# Altium PCB ESP_Grow_Main_Rev_A.PcbDoc (part 1 of 2)
Units mil, origin at the board's own origin, x right, y up, seen from the top; angles counter-clockwise.
Board outline 3149.61 x 3149.61 mil, 4 copper layers (Top Copper, GND, Power, Bottom Copper), stack 61.811 mil thick; 66 components, 30 nets, 190 pads, 293 vias.
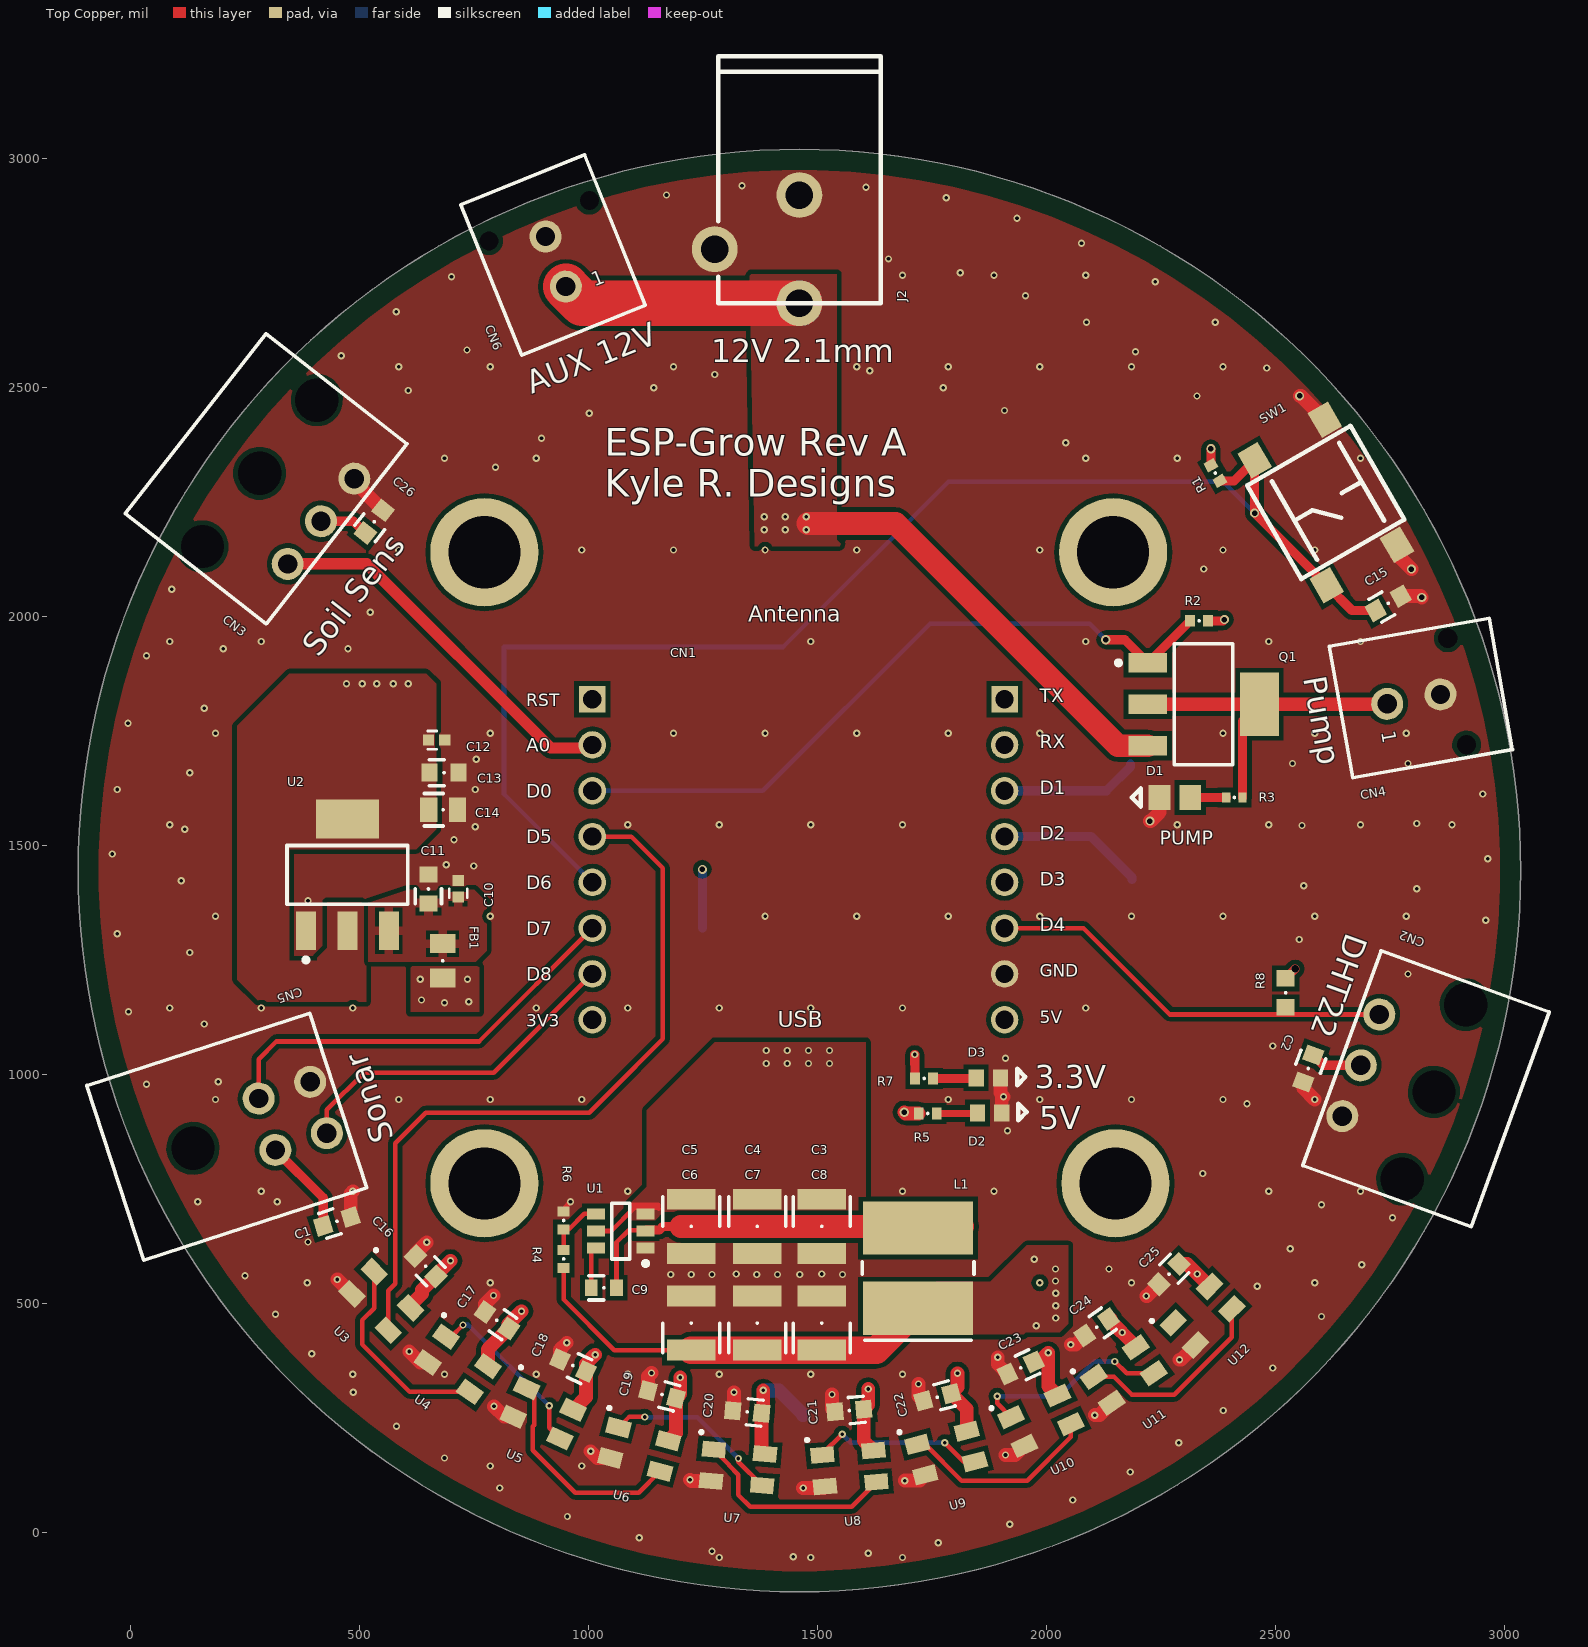
[diagram p0: Top Copper view]
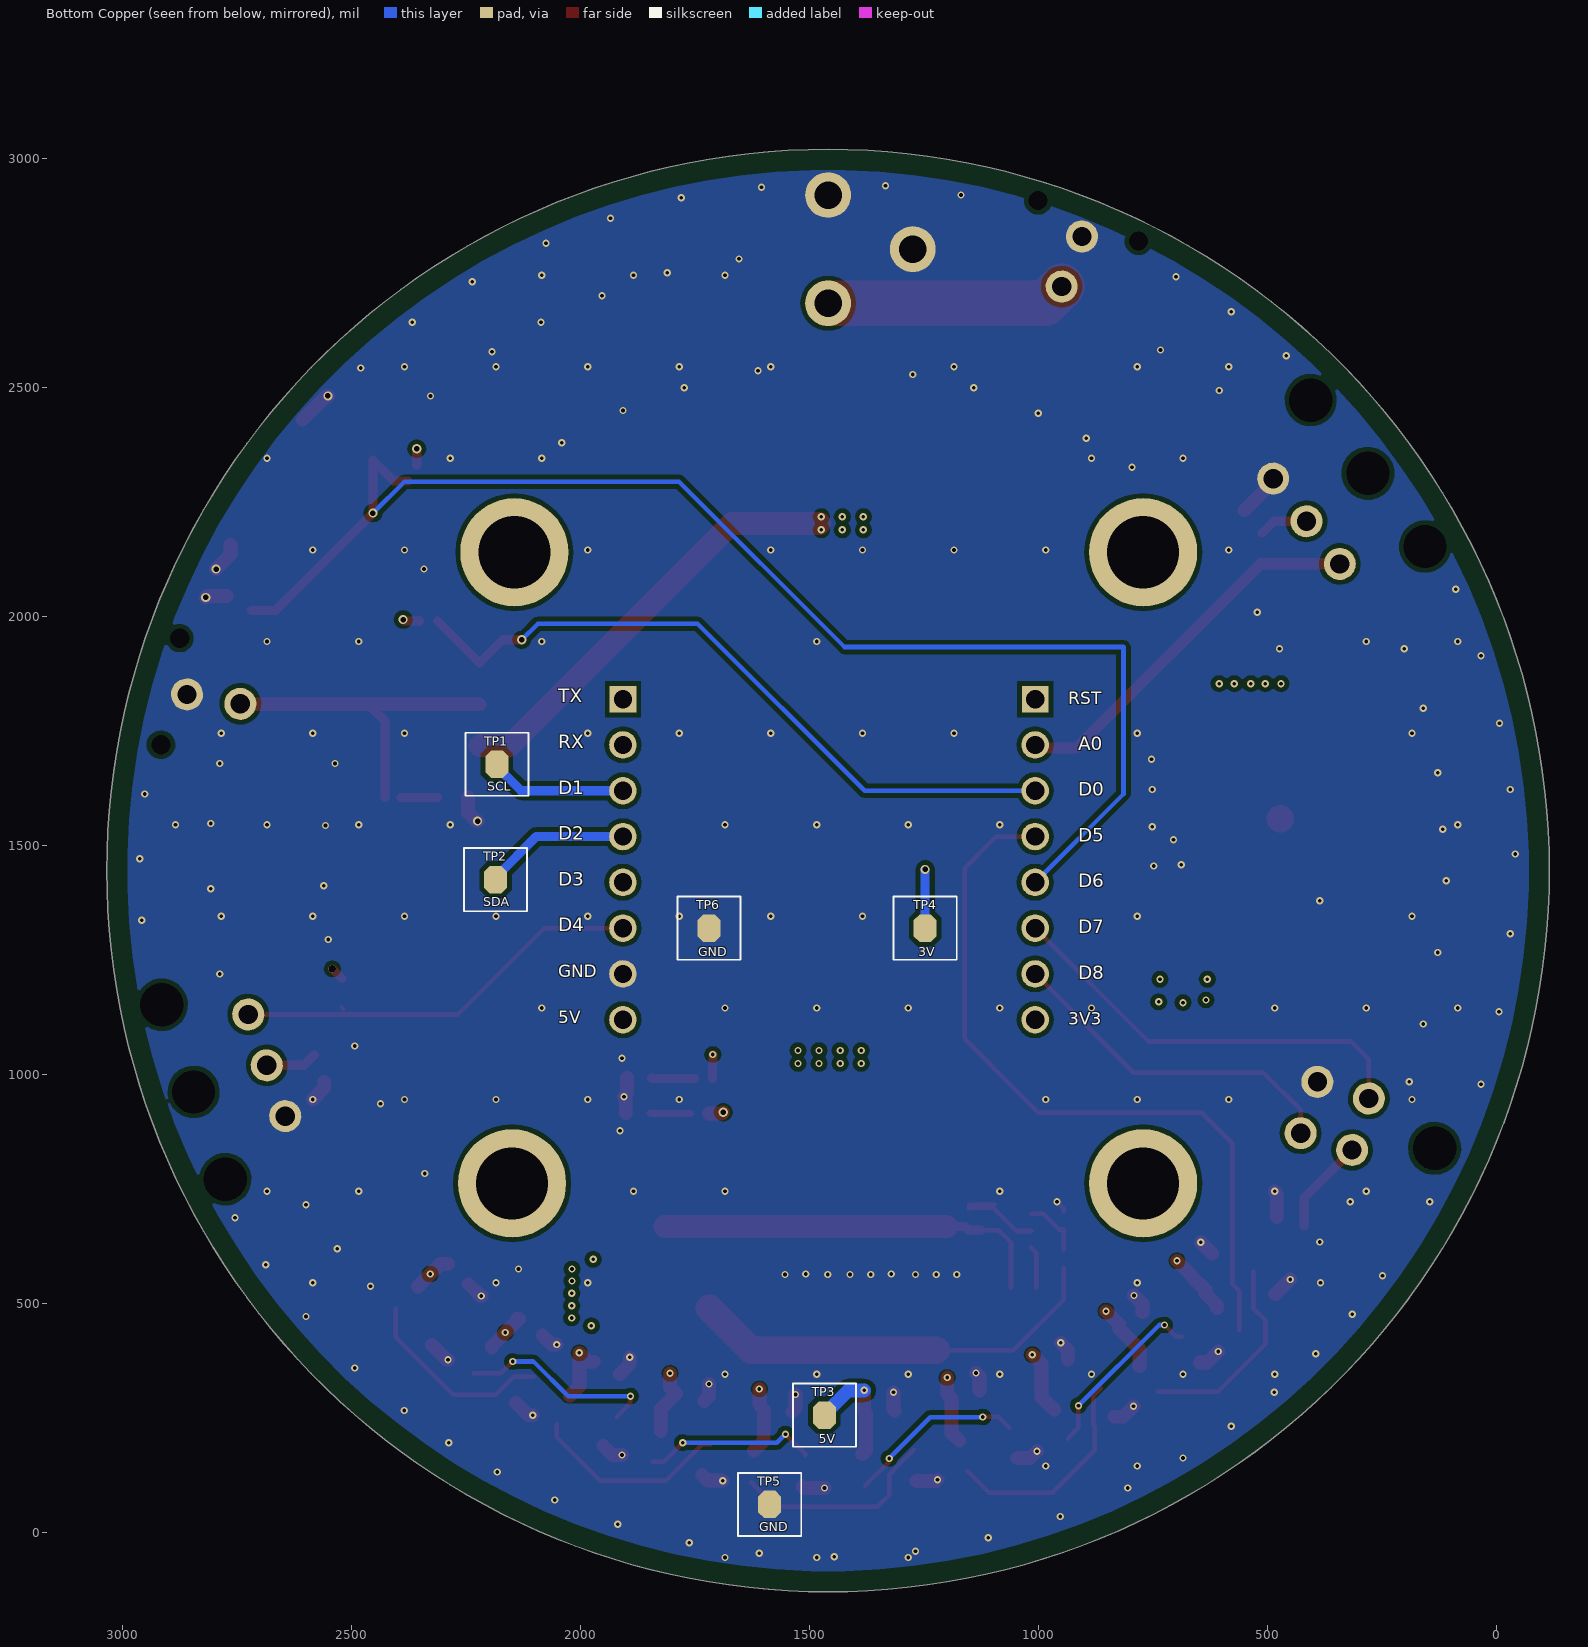
[diagram p1: Bottom Copper view, seen from below]
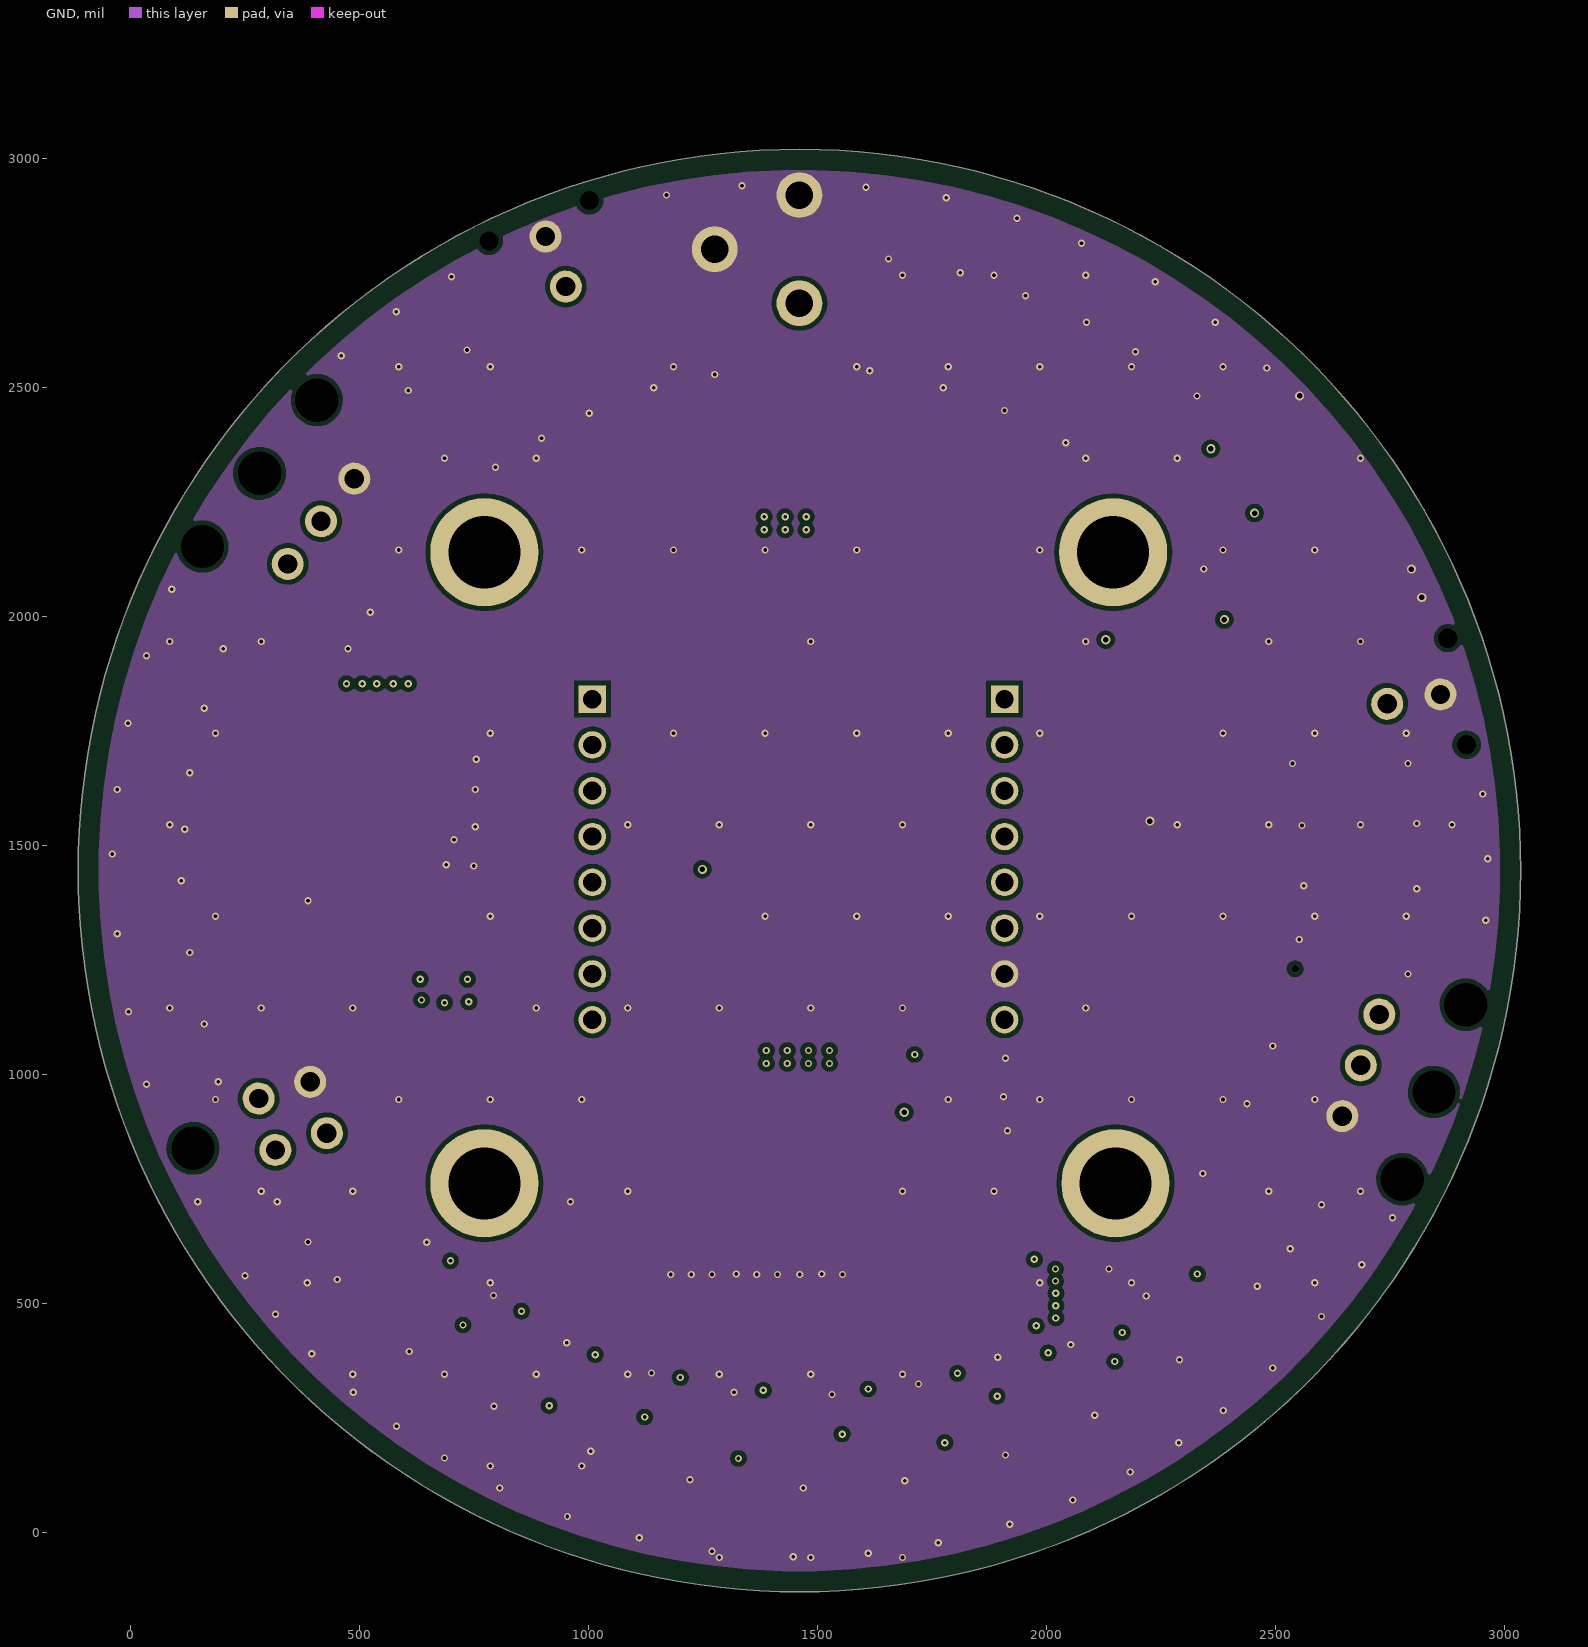
[diagram p2: GND]
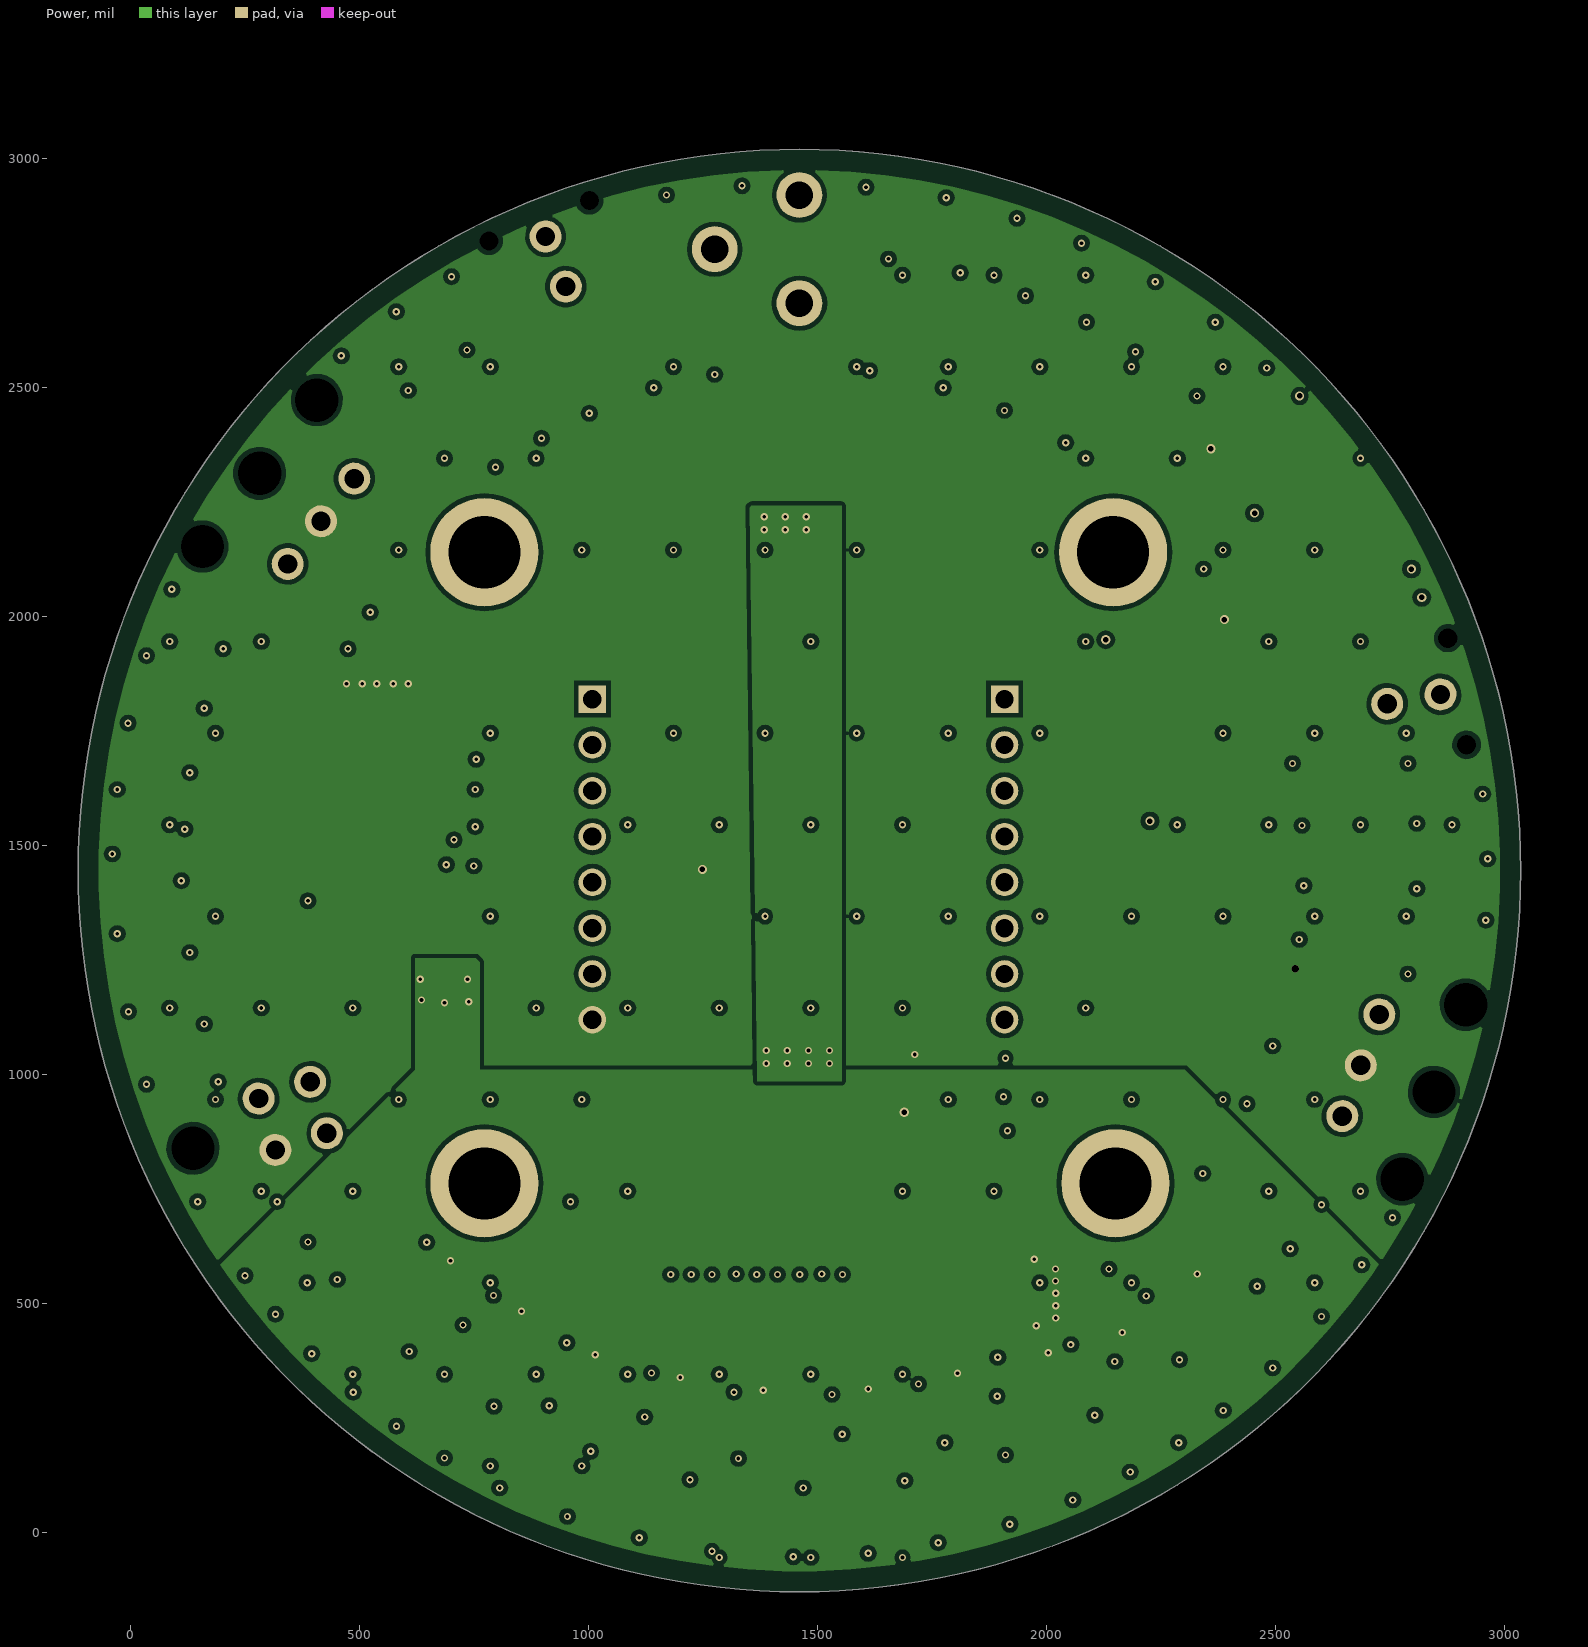
[diagram p3: Power]
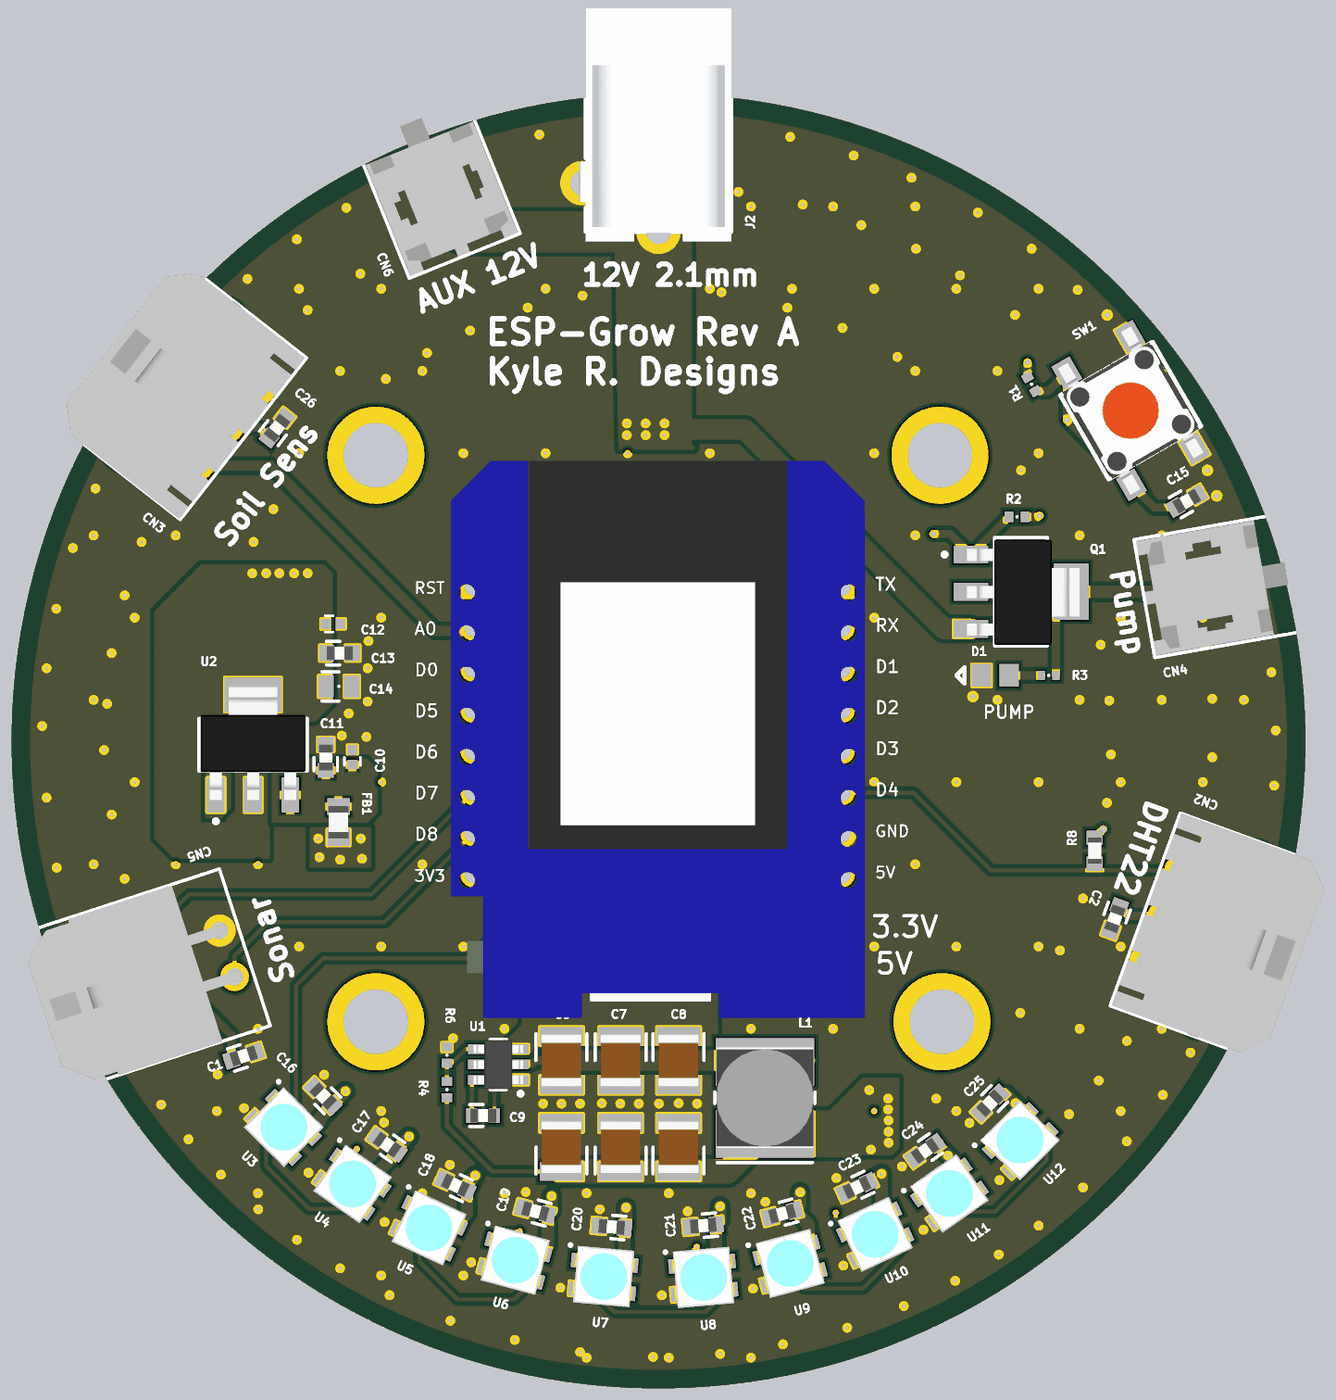
[diagram p4: 3D render of the assembled board from above, using the file's embedded part models]

## Layer stack, top to bottom
Top Mask: solder mask 0.591, Solder Resist, Dk 3.8
Top Copper: signal copper 1.378
Dielectric 1: prepreg 3.937, 2313, Dk 4.05
GND: signal copper 0.689
Core: core 49.803, FR-4, Dk 4.5
Power: signal copper 0.689
Dielectric 2: prepreg 3.937, 2313, Dk 4.05
Bottom Copper: signal copper 1.378
Bottom Mask: solder mask 0.591, Solder Resist, Dk 3.8

## Board outline
-114.8,1445 ccw(c1460,1445) 1460,-129.8 ccw(c1460,1445) 3034.8,1445 ccw(c1460,1445) 1460,3019.8 ccw(c1460,1445)

## Design rules (kind name [scope] priority, off if disabled: settings)
BoardOutlineClearance [All] p1: gap=10 ignorepadtopadclearanceinfootprint=FALSE except(0: Arc-SplitContinuation Track-OutlineEdge Track-SplitContinuation SMDPad-SplitContinuation THPad-SplitContinuation Via-SplitContinuation Fill-SplitContinuation Poly-SplitContinuation Region-SplitContinuation Text-SplitContinuation; 45: Poly-OutlineEdge)
Clearance [All] p1: gap=10 ignorepadtopadclearanceinfootprint=TRUE except(0: Arc-Hole Track-Hole SMDPad-Hole THPad-Hole Via-Hole Fill-Hole Poly-Hole Region-Hole Text-Hole; 2: SMDPad-SMDPad)
HoleSize [All] p1: absolutevalues=TRUE maxlimit=250 minlimit=1 maxpercent=80.000 minpercent=20.000
MinimumSolderMaskSliver [All] p1: minsoldermaskwidth=0
PlaneConnect NetC6_1 [InNet('NetC6_1')] p1: planeconnectstyle=Direct reliefexpansion=20 reliefentries=4 reliefconductorwidth=10 reliefairgap=10
PlaneConnect [All] p2: planeconnectstyle=Direct reliefexpansion=20 reliefentries=4 reliefconductorwidth=10 reliefairgap=10
PolygonConnect PolygonConnect_1 [InNet('5V') Or InNet('3.3V') Or InNet('GND') Or InNet('12V')] p1: connectstyle=Direct reliefconductorwidth=10 reliefentries=4 polygonreliefangle="90 Angle" airgapwidth=10
PolygonConnect PolygonConnect_2 [InNet('NetC6_1')] p2: connectstyle=Direct reliefconductorwidth=10 reliefentries=4 polygonreliefangle="90 Angle" airgapwidth=10
PolygonConnect [All] p3: connectstyle=Relief reliefconductorwidth=20 reliefentries=4 polygonreliefangle="90 Angle" airgapwidth=8
RoutingVias [All] p1: holewidth=12 width=20 viastyle="Through Hole" minholewidth=6 minwidth=10 maxholewidth=28 maxwidth=50
SilkToSilkClearance [All] p1: silktosilkclearance=2
SilkToSolderMaskClearance [IsPad] p1: minsilkscreentomaskgap=1 clearancetoexposedcopper=TRUE
SolderMaskExpansion [All] p1: expansion=4
Width [All] p1: maxlimit=300 minlimit=6 preferedwidth=10
25 further rules are at their usual default settings.

## Components (designator, comment, footprint, x,y, rotation, side; value= is the part's Value field where it differs from the comment)
C1 "1uF" CAPC0603(1608)_N 450.23,679.02 r18 top
C2 "1uF" CAPC0603(1608)_N 2570.87,1012.8 r250 top
C3 "10uF" CAPC1210(3225)_N 1508.78,668 r270 top
C4 "10uF" CAPC1210(3225)_N 1367.78,668 r270 top
C5 "10uF" CAPC1210(3225)_N 1223.78,668 r270 top
C6 "10uF" CAPC1210(3225)_N 1223.78,457 r90 top
C7 "10uF" CAPC1210(3225)_N 1367.78,457 r90 top
C8 "10uF" CAPC1210(3225)_N 1508.78,457 r90 top
C9 "0.1uF" CAPC0603(1608)_L 1033,534 r0 top
C10 "0.1uF" CAPC0402(1005)_N 715,1405.28 r90 top
C11 "1uF" CAPC0603(1608)_N 650,1404.82 r90 top
C12 "0.1uF" CAPC0402(1005)_N 668,1729.82 r0 top
C13 "1uF" CAPC0603(1608)_N 684,1658.82 r0 top
C14 "10uF" CAPC0805(2012)_L 682,1577.82 r0 top
C15 "1uF" CAPC0603(1608)_N 2745.72,2028.57 r30 top
C16 "1uF" CAPC0603(1608)_N 643.73,581.27 r135 top
C17 "1uF" CAPC0603(1608)_N 799.2,463.07 r145 top
C18 "1uF" CAPC0603(1608)_N 965.45,364.31 r155 top
C19 "1uF" CAPC0603(1608)_N 1160,301 r165 top
C20 "1uF" CAPC0603(1608)_N 1346,263 r175 top
C21 "1uF" CAPC0603(1608)_N 1569,266 r185 top
C22 "1uF" CAPC0603(1608)_N 1761,295 r195 top
C23 "1uF" CAPC0603(1608)_N 1943,359 r205 top
C24 "1uF" CAPC0603(1608)_N 2109,448 r215 top
C25 "1uF" CAPC0603(1608)_N 2267,564 r225 top
C26 "1uF" CAPC0603(1608)_N 531.5,2206.69 r52 top
CN1 "J/Wemo_ESP_Shield" WEMOS_D1 954.25,771.89 r0 top locked
CN2 "DHT22" "Molex 1x3 Microfit 90deg" 2685.65,1019.78 r160 top
CN3 "Soil Sens" "Molex 1x3 Microfit 90deg" 415.35,2207.68 r322 top
CN4 "Pump" "Molex 1x2 Microfit 3.0" 2743.41,1809.06 r280 top
CN5 "Sonar" "Molex 2x2 Microfit 90deg" 180.35,701.54 r18 top
CN6 "AUX 12V" "Molex 1x2 Microfit 3.0" 950,2720 r22 top
D1 "D/LEDR/0805" D/0805 2279.72,1604.57 r0 top
D2 "D/LEDB/0603" D/0603 1875.2,915.86 r180 top
D3 "D/LEDB/0603" D/0603 1872.32,992.39 r180 top
FB1 "600 Ohm @ 100MHz" RESC0805(2012)_N 681,1248 r90 top
J2 "12V 2.1mm" CONN_PWR_JACK_2.1x5.5mm 1460,2683.78 r0 top
L1 "4.7uH" INDP6060X45N 1719,577 r90 top
Q1 "DMP6023LE-13" "SOT-223 - DMP6023LE" 2342.52,1808.07 r270 top
R1 "10K" RESC0402(1005)_N 2368.11,2312.99 r120 top
R2 "10K" RESC0402(1005)_N 2332.68,1990.16 r0 top
R3 "1K" RESC0402(1005)_L 2409.72,1604.57 r0 top
R4 "56.2K 1%" RESC0402(1005)_N 945,597 r270 top
R5 "470" RESC0402(1005)_N 1740.2,914.64 r180 top
R6 "10K" RESC0402(1005)_N 945,681 r270 top
R7 "100" RESC0402(1005)_N 1732.32,991.05 r180 top
R8 "4.7K" RESC0603(1608)_N 2521.65,1178.15 r90 top
SW1 "SPST-NO 12V" "SW TACT Red 6mm x 6mm" 2609.27,2248.66 r120 top
TP1 "SCL" Pogo-Testpoint 2183.07,1677.17 r180 bottom
TP2 "SDA" Pogo-Testpoint 2186.02,1425.2 r180 bottom
TP3 "5V" Pogo-Testpoint 1468,256 r180 bottom
TP4 "3V" Pogo-Testpoint 1248.02,1319.29 r180 bottom
TP5 "GND" Pogo-Testpoint 1587.6,61.02 r180 bottom
TP6 "GND" Pogo-Testpoint 1720,1319.29 r180 bottom
U1 "U/TPS562209DDCR" SOT-23 1070,658 r180 top
U2 "3.3V" DSO-G3 473,1435.82 r0 top
U3 "SK6812 MINI" SK6812_MINI 531.66,569.34 r315 top
U4 "SK6812 MINI" SK6812_MINI 688.09,427.36 r325 top
U5 "SK6812 MINI" SK6812_MINI 864.31,314.85 r335 top
U6 "SK6812 MINI" SK6812_MINI 1065,229 r345 top
U7 "SK6812 MINI" SK6812_MINI 1273,180.64 r355 top
U8 "SK6812 MINI" SK6812_MINI 1510,168.64 r5 top
U9 "SK6812 MINI" SK6812_MINI 1717,192 r15 top
U10 "SK6812 MINI" SK6812_MINI 1921.88,251.44 r25 top
U11 "SK6812 MINI" SK6812_MINI 2102.48,339.44 r35 top
U12 "SK6812 MINI" SK6812_MINI 2276.28,457.72 r45 top

## Footprints (in the part's own frame and the unit in brackets; to place one, negate y for a bottom-side part, rotate by r counter-clockwise, add the part's x,y. Pads: shape width x height; smd on the part's side, far side on the other; paste and mask are expansions set on the pad)
CAPC0402(1005)_N [mm] "Chip Capacitor, Body 1.0x0.5mm, Height 0.7mm, IPC Medium Density"
  rect 0.62x0.62 smd: 1(-0.45,0) 2(0.45,0)
  silkscreen extent -0.5,-0.5 0,0.5, body extent -0.55,-0.3 0.55,0.3, height 0.7
CAPC0603(1608)_L [mm] "Chip Capacitor, Body 1.6x0.8mm, Height 1.0mm, IPC High Density"
  rect 0.7x0.9 smd: 1(-0.7,0) 2(0.7,0)
  silkscreen extent -0.82,-0.68 0.05,0.68, body extent -0.8,-0.44 0.8,0.43, height 0.86
CAPC0603(1608)_N [mm] "Chip Capacitor, Body 1.6x0.8mm, Height 1.0mm, IPC Medium Density"
  rect 0.9x1 smd: 1(-0.8,0) 2(0.8,0)
  silkscreen extent -0.82,-0.73 0.05,0.73, body extent -0.8,-0.44 0.8,0.43, height 0.86
CAPC0805(2012)_L [mm] "Chip Capacitor, Body 2.0x1.2mm, Height 1.55mm, IPC High Density"
  rect 0.95x1.35 smd: 1(-0.8,0) 2(0.8,0)
  silkscreen extent -1.05,-0.9 0.05,0.9, body extent -1.1,-0.72 1.1,0.72, height 1.55
CAPC1210(3225)_N [mm] "Chip Capacitor, Body 3.2x2.5mm, Height 6.3mm, IPC Medium Density"
  rect 1.15x2.7 smd: 1(-1.5,0) 2(1.5,0)
  silkscreen extent -1.65,-1.58 0.05,1.57, body extent -1.6,-1.25 1.6,1.25, height 2.5
CONN_PWR_JACK_2.1x5.5mm [mil] "Power Connector, 2.1mm ID, 5.5mm OD"
  round 100 hole 60: 1(0,0) 2(0,236.22) 3(-185.04,118.11)
  silkscreen extent -177,0 177,539, body extent -193,-24 177,543, height 433
D/0603 [mm] "LED, 2-Leads, Body 1.60x0.80mm, IPC Medium Density"
  rect 0.85x0.95 smd: 1(-0.675,0) 2(0.675,0)
  silkscreen extent -2.05,-0.5 -1.6,0.4, body extent -0.85,-0.45 0.85,0.45, height 0.9
D/0805 [mm] "LED, 2-Leads, Body 2.00x1.25mm, IPC Medium Density"
  rect 1.2x1.4 smd: 1(-0.85,0) 2(0.85,0)
  silkscreen extent -2.4,-0.5 -1.9,0.5, body extent -1.05,-0.67 1.05,0.67, height 1.35
DSO-G3 [mm] "SOT-223/SC-73; 4 Leads; Body 6.7 x 7.3 mm, inc. leads (LxW max)"
  rect 1.1x2.15 smd: 1(-2.3,-3.1) 2(0,-3.1) 3(2.3,-3.1)
  rect 3.5x2.15 smd: 4(0,3.1)
  silkscreen extent -3.35,-4.85 3.35,1.63, body extent -3.25,-3.4 3.25,3.56, height 1.68
INDP6060X45N [mm] "Precision Wire Wound Inductor, 2-Leads, Body 6.00x6.00mm, IPC Medium Density"
  rect 2.95x6.1 smd: 1(-2.225,0) 2(2.225,0)
  silkscreen extent -4,-3.1 0.35,3.1, body extent -3.1,-3 3.1,3, height 4.6
"Molex 1x2 Microfit 3.0" [mil] "Connector; Header; 1x2 Position"
  round 0 hole 42 unplated: 0(-118.11,155.11) 0(118.11,155.11)
  round 70 hole 42: 1(0,0) 2(0,118.11)
  silkscreen extent -146,-102 146,252, body extent -141,-98 141,248, height 390
"Molex 1x3 Microfit 90deg" [mil] "Molex Microfit 1x3 90deg"
  round 0 hole 94.5 unplated: 0(-170.08,202.76) 0(-170.08,-202.76) 0(-170.08,0)
  round 70 hole 42: 1(0,-118.11) 2(0,0) 3(0,118.11)
  silkscreen extent -347,-250 44,249, body extent -349,-251 41,247, height 222
"Molex 2x2 Microfit 90deg" [mil] "Microfit 90 deg 2x2 Position"
  round 0 hole 94.88 unplated: 0(0,144.09)
  round 70 hole 42: 1(170.08,85.04) 2(170.08,203.15) 3(288.19,85.04) 4(288.19,203.15)
  silkscreen extent -178,-55 334,346, body extent -179,-56 303,344, height 348
Pogo-Testpoint [mil] "Test Point - Top Pad Only"
  oct 50x60 smd paste-60: 1(0,0)
  silkscreen extent -69,-69 69,69
RESC0402(1005)_L [mm] "Chip Resistor, Body 1.0x0.5mm, IPC High Density"
  rect 0.45x0.55 smd: 1(-0.45,0) 2(0.45,0)
  silkscreen extent -0.05,-0.05 0.05,0.05, body extent -0.52,-0.27 0.53,0.28, height 0.4
RESC0402(1005)_N [mm] "Chip Resistor, Body 1.0x0.5mm, IPC Medium Density"
  rect 0.55x0.65 smd: 1(-0.5,0) 2(0.5,0)
  silkscreen extent -0.05,-0.05 0.05,0.05, body extent -0.52,-0.27 0.53,0.28, height 0.4
RESC0603(1608)_N [mm] "Chip Resistor, Body 1.6x0.8mm, IPC Medium Density"
  rect 0.9x1 smd: 1(-0.8,0) 2(0.8,0)
  silkscreen extent -0.05,-0.05 0.05,0.05, body extent -0.8,-0.43 0.8,0.43, height 0.51
RESC0805(2012)_N [mm] "Chip Resistor, Body 2.0x1.3mm, IPC Medium Density"
  rect 1.05x1.4 smd: 1(-0.95,0) 2(0.95,0)
  silkscreen extent -0.05,-0.05 0.05,0.05, body extent -1.01,-0.63 0.99,0.63, height 0.46
SK6812_MINI [mm] "RGB LED"
  rect 1.3x0.9 smd: 1(0,0) 2(0,-1.75) 3(2.85,-1.75) 4(2.85,0)
  silkscreen extent -0.82,0.86 -0.72,0.96, body extent -0.41,-2.6 3.29,0.9, height 1
SOT-23 [mm] "SOT23, 6-Leads, Body 2.90x2.80mm, Pitch 0.95mm, IPC Medium Density"
  rect 1x0.6 smd: 1(-1.375,0.95) 2(-1.375,0) 3(-1.375,-0.95) 4(1.375,-0.95) 5(1.375,0) 6(1.375,0.95)
  silkscreen extent -1.5,-1.55 0.5,1.92, body extent -1.53,-1.53 1.53,1.53, height 1.1
"SOT-223 - DMP6023LE" [mm] "SOT-223/SC-73; 4 Leads; Body 6.7 x 7.3 mm, inc. leads (LxW max)"
  rect 1.1x2.15 smd: D(0,-3.1) G(-2.3,-3.1) S(2.3,-3.1)
  rect 3.5x2.15 smd: D(0,3.1)
  silkscreen extent -3.35,-4.85 3.35,1.63, body extent -3.22,-3.35 3.28,3.61, height 1.68
"SW TACT Red 6mm x 6mm" [mm] "Switch, tactile, red button, SMD 6 mm x 6 mm"
  rect 1.6x1.3 smd: 1(-4,2.25) 2(4,2.25) 3(-4,-2.25) 4(4,-2.25)
  silkscreen extent -3,-3.3 3,3.3, body extent -4.5,-3.1 4.5,3.1, height 4.3
WEMOS_D1 [mil] "Wemos D1 footprint"
  rect 58.09x58.09 / inner rect 60x60 / far side rect 58.09x58.09 hole 40: 1(53.62,1047.4) 16(953.62,1047.4)
  round 60 hole 40: 2(53.62,947.4) 3(53.62,847.4) 4(53.62,747.4) 5(53.62,647.4) 6(53.62,547.4) 7(53.62,447.4) 8(53.62,347.4) 9(953.62,347.4) 10(953.62,447.4) 11(953.62,547.4) 12(953.62,647.4) 13(953.62,747.4) 14(953.62,847.4) 15(953.62,947.4)
  body extent 0,0 1008,1354, height 583

## Part data
C1 C2 C11 C13 C15 C16 C17 C18 C19 C20 C21 C22 C23 C24 C25 C26: library part "CAP CER 1UF 25V 10% X7R 0603", "1uF 0603 25V", Manufacturer="TDK Corporation", Manufacturer Part Number=CGA3E1X7R1E105K080AC, Operating Temperature="-55°C ~ 125°C", Package / Case=0603, Ratings=AEC-Q200, Supplier Part Number 1=445-6931-1-ND, Temperature Coefficient=X7R, Tolerance=±10%, Voltage - Rated=25V, Applications=Automotive, Category=Capacitors, ComponentLink1Description=https://product.tdk.com/info/en/catalog/datasheets/mlcc_automotive_general_en.pdf, ComponentLink1URL=https://product.tdk.com/info/en/catalog/datasheets/mlcc_automotive_general_en.pdf, Failure Rate=-, Features=-, Height - Seated (Max)=-, Lead Spacing=-, Lead Style=-, Mounting Type="Surface Mount, MLCC", Packaging="Cut Tape (CT)", Part Status=Active, Pricing 1="1=0.2, 10=0.135, 100=0.0686, 500=0.04696, 1000=0.04154 (USD)", RoHS="RoHS Compliant", Size / Dimension="0.063\" L x 0.032\" W (1.60mm x 0.80mm)", Stock 1=360610, Supplier 1=Digi-Key, Thickness (Max)="0.035\" (0.90mm)"
C3 C4 C5 C6 C7 C8: library part "CAP CER 10UF 25V JB 1210", "10uF 1210 25V", Manufacturer="TDK Corporation", Manufacturer Part Number=C3225JB1E106K250AA, Operating Temperature="-25°C ~ 85°C", Package / Case=1210, Ratings=-, Supplier Part Number 1=445-11850-1-ND, Temperature Coefficient=JB, Tolerance=±10%, Voltage - Rated=25V, Applications="General Purpose", Category=Capacitors, ComponentLink1Description=https://product.tdk.com/info/en/catalog/datasheets/mlcc_commercial_general_en.pdf, ComponentLink1URL=https://product.tdk.com/info/en/catalog/datasheets/mlcc_commercial_general_en.pdf, Failure Rate=-, Features="Low ESL", Height - Seated (Max)=-, Lead Spacing=-, Lead Style=-, Mounting Type="Surface Mount, MLCC", Notification="Current market demand for these product types have resulted in fluctuating and extending lead times. Lead times may differ.", Packaging="Cut Tape (CT)", Part Status=Active, Pricing 1="1=0.74, 10=0.525, 100=0.3454, 500=0.25588 (USD)", RoHS="RoHS Compliant", Size / Dimension="0.126\" L x 0.098\" W (3.20mm x 2.50mm)", Stock 1=19014, Supplier 1=Digi-Key, Thickness (Max)="0.110\" (2.80mm)", Voltage Rated=25V
C9: library part "CAP CER 0.1UF 16V 10% X7R 0603", "0.1uF 0603 16V", Capacitance=0.1µF, Manufacturer=Kemet, Manufacturer Part Number=C0603C104K4RACTU, Operating Temperature="-55°C ~ 125°C", Package / Case=0603, Ratings=-, Supplier Part Number 1=399-1096-2-ND, Temperature Coefficient=X7R, Tolerance=±10%, Voltage - Rated=16V, Applications="General Purpose", Category=Capacitors, ComponentLink1Description=http://www.kemet.com/datasheets&C0603C104K4RACTU, ComponentLink1URL=http://www.kemet.com/datasheets&C0603C104K4RACTU, Features=-, Height - Seated (Max)=-, Lead Spacing=-, Lead Style=-, Mounting Type="Surface Mount, MLCC", Packaging="Tape & Reel (TR)", Pricing 1="4000=0.00414, 8000=0.00378, 12000=0.0036, 28000=0.00342, 100000=0.00248 (USD)", RoHS="RoHS Compliant", Size / Dimension="0.063\" L x 0.031\" W (1.60mm x 0.80mm)", Stock 1=2360000, Supplier 1=Digi-Key, Thickness (Max)="0.034\" (0.87mm)"
C10 C12: library part "CAP CER 0.1UF 25V 10% X5R 0402", "0.1uF 0402 25V", Manufacturer="Taiyo Yuden", Manufacturer Part Number=TMK105BJ104KV-F, Operating Temperature="-55°C ~ 85°C", Package / Case=0402, Ratings=-, Supplier Part Number 1=587-1456-1-ND, Temperature Coefficient=X5R, Tolerance=±10%, Voltage - Rated=25V, Applications="General Purpose", Category=Capacitors, ComponentLink1Description=http://ds.yuden.co.jp/TYCOMPAS/ut/detail.do?productNo=TMK105BJ104KV-F&fileName=TMK105BJ104KV-F_SS&mode=specSheetDownload, ComponentLink1URL=http://ds.yuden.co.jp/TYCOMPAS/ut/detail.do?productNo=TMK105BJ104KV-F&fileName=TMK105BJ104KV-F_SS&mode=specSheetDownload, Features=-, Height - Seated (Max)=-, Lead Spacing=-, Lead Style=-, Mounting Type="Surface Mount, MLCC", Notification="Current market demand for these product types have resulted in fluctuating and extending lead times. Lead times may differ.", Packaging="Cut Tape (CT)", Part Status=Active, Pricing 1="1=0.1, 10=0.043, 100=0.019, 500=0.0136, 1000=0.01069, 2500=0.00972, 5000=0.00894 (USD)", RoHS="RoHS Compliant", Size / Dimension="0.039\" L x 0.020\" W (1.00mm x 0.50mm)", Stock 1=5172635, Supplier 1=Digi-Key, Thickness (Max)="0.022\" (0.55mm)"
C14: library part "CAP CER 10UF 25V X6S 0805", "10UF 25V X6R 0805", Manufacturer="Murata Electronics North America", Manufacturer Part Number=GRM21BC81E106ME51L, Operating Temperature="-55°C ~ 105°C", Package / Case=0805, Ratings=-, Supplier Part Number 1=490-10503-1-ND, Temperature Coefficient=X6S, Tolerance=±20%, Voltage - Rated=25V, Applications="General Purpose", Category=Capacitors, ComponentLink1Description=http://search.murata.co.jp/Ceramy/image/img/A01X/G101/ENG/GRM21BC81E106ME51-01.pdf, ComponentLink1URL=http://search.murata.co.jp/Ceramy/image/img/A01X/G101/ENG/GRM21BC81E106ME51-01.pdf, Features=-, Height - Seated (Max)=-, Lead Spacing=-, Lead Style=-, Mounting Type="Surface Mount, MLCC", Notification="Current market demand for these product types have resulted in fluctuating and extending lead times. Lead times may differ.", Packaging="Cut Tape (CT)", Part Status=Active, Pricing 1="1=0.29, 10=0.199, 100=0.1009, 500=0.06906, 1000=0.0611 (USD)", RoHS="RoHS Compliant", Size / Dimension="0.079\" L x 0.049\" W (2.00mm x 1.25mm)", Stock 1=23735, Supplier 1=Digi-Key, Thickness (Max)="0.055\" (1.40mm)"
CN1: "Wemo Mini Shield for ESP-12", Name="Wemo Mini Shield"
CN2 CN3: library part "MICROFIT 3.0 HDR 90deg 3CKT", "Molex Microfit 1x3 90deg Header", Color=Black, Manufacturer="Molex Inc", Manufacturer Part Number=0436500304, Supplier Part Number 1=WM1876-ND, Category="Connectors, Interconnects", ComponentLink1Description=http://www.molex.com/pdm_docs/sd/436500304_sd.pdf, ComponentLink1URL=http://www.molex.com/pdm_docs/sd/436500304_sd.pdf, Connector Type="Header, Shrouded", Contact Finish=Gold, Contact Finish Thickness="15µin (0.38µm)", Contact Mating Length=-, Contact Type="Male Pin", Fastening Type="Locking Ramp", Features="Board Lock", Mounting Type="Through Hole, Right Angle", Number of Positions=3, Number of Positions Loaded=All, Number of Rows=1, Packaging=Tray, Pitch="0.118\" (3.00mm)", Pricing 1="1=1.39, 10=1.224, 50=1.104, 100=1.056, 250=0.96, 500=0.864, 1000=0.768, 2500=0.696, 5000=0.672 (USD)", RoHS="RoHS Compliant", Row Spacing=-, Stock 1=42564, Supplier 1=Digi-Key, Termination=Solder
CN4 CN6: library part "MICROFIT 3.0 HDR VERT CPI 2CKT", "Molex Microfit 1x2 Vert Header", Color=Black, Manufacturer="Molex, LLC", Manufacturer Part Number=0430450227, Supplier Part Number 1=WM10657-ND, Category="Connectors, Interconnects", ComponentLink1Description=http://www.molex.com/pdm_docs/sd/430450227_sd.pdf, ComponentLink1URL=http://www.molex.com/pdm_docs/sd/430450227_sd.pdf, Connector Type=Header, Contact Finish=Tin, Contact Finish Thickness="60µin (1.52µm)", Contact Mating Length=-, Contact Type="Male Pin", Fastening Type="Locking Ramp", Features="Board Guide", Mounting Type="Through Hole", Number of Positions=2, Number of Positions Loaded=All, Number of Rows=2, Packaging=Tray, Part Status=Active, Pitch=-, Pricing 1="1=0.8, 10=0.705, 50=0.636, 100=0.6083, 250=0.553, 500=0.4977, 1000=0.4424, 2500=0.40092, 5000=0.3871 (USD)", RoHS="RoHS Compliant", Row Spacing="0.118\" (3.00mm)", Shrouding="Shrouded - 4 Wall", Stock 1=4002, Supplier 1=Digi-Key, Termination=Solder
CN5: library part "MICROFIT 3.0 HDR 90deg 4CKT", "Molex Microfit 2x2 90deg Header", Color=Black, Manufacturer="Molex Inc", Manufacturer Part Number=0430450400, Supplier Part Number 1=WM1814-ND, Category="Connectors, Interconnects", ComponentLink1Description=http://www.molex.com/pdm_docs/sd/430450400_sd.pdf, ComponentLink1URL=http://www.molex.com/pdm_docs/sd/430450400_sd.pdf, Connector Type="Header, Shrouded", Contact Finish=Tin, Contact Finish Thickness="100µin (2.54µm)", Contact Mating Length=-, Contact Type="Male Pin", Fastening Type="Locking Ramp", Features="Board Lock", Mounting Type="Through Hole, Right Angle", Number of Positions=4, Number of Positions Loaded=All, Number of Rows=2, Packaging=Tray, Pitch="0.118\" (3.00mm)", Pricing 1="1=1.35, 10=1.228, 50=1.1026, 100=1.0525, 250=0.95228, 500=0.8771, 1000=0.7518, 2500=0.70168, 5000=0.6666 (USD)", RoHS="RoHS Compliant", Row Spacing="0.118\" (3.00mm)", Stock 1=9668, Supplier 1=Digi-Key, Termination=Solder
D1: "Red 625nm LED Indication - Discrete 2V 0805", Current - Test=20mA, Package / Case=0805, Supplier Part Number 1=732-4984-6-ND, Voltage - Forward (Vf) (Typ)=2V, Cost=0.23, Digikey Part=732-4984-1-ND, Supplier 1=Digi-Key
D2 D3: Current - Test=5mA, Package / Case=0603, Supplier Part Number 1=1080-1562-6-ND, Voltage - Forward (Vf) (Typ)=2.8V, Datasheet=https://everlightamericas.com/index.php?controller=attachment&id_attachment=3217, Supplier 1=Digi-Key
FB1: library part "FERRITE 600 OHM 2.0A 0805", "600 OHM 0805 2.0A", Current Rating=2A, DC Resistance (DCR)="150 mOhm Max", Manufacturer="Wurth Electronics Inc", Manufacturer Part Number=742792040, Package / Case="0805 (2012 Metric)", Supplier Part Number 1=732-1620-1-ND, Category=Filters, ComponentLink1Description=http://katalog.we-online.de/pbs/datasheet/742792040.pdf, ComponentLink1URL=http://katalog.we-online.de/pbs/datasheet/742792040.pdf, Creator=osman, Filter Type="Differential Mode - Single", Height (Max)="0.043\" (1.10mm)", Impedance @ Frequency="600 Ohm @ 100MHz", Mounting Type="Surface Mount", Packaging="Cut Tape (CT)", Pricing 1="1=0.24, 50=0.2344, 100=0.2156, 500=0.20624, 1000=0.19687, 2000=0.1875 (USD)", RoHS="RoHS Compliant", Size / Dimension="0.079\" L x 0.047\" W (2.00mm x 1.20mm)", Stock 1=34670, Supplier 1=Digi-Key
J2: library part "CONN PWR JACK 2.1", "2.1 mm barrel jack", Color=Black, Current Rating=2.5A, Manufacturer="CUI Inc", Manufacturer Part Number=PJ-002A, Operating Temperature="-25°C ~ 85°C", Supplier Part Number 1=CP-002AH-ND, Voltage - Rated=16VDC, Category="Connectors, Interconnects", ComponentLink1Description="Manufacturer Link", ComponentLink1URL=http://domino.kycon.com/internet/Products.html, ComponentLink2Description=http://www.cui.com/product/resource/digikeypdf/pj-002a.pdf, ComponentLink2URL=http://www.cui.com/product/resource/digikeypdf/pj-002a.pdf, ComponentLink3Description=http://www.cui.com/product/resource/digikeypdf/pj-002ah.pdf, ComponentLink3URL=http://www.cui.com/product/resource/digikeypdf/pj-002ah.pdf, Connector Type=Jack, Contact Material="Copper Alloy", Contact Material - Plating=Tin, DatasheetDocument=09-May-2002, Features=-, Gender=Male, Housing Color=Black, Housing Material=Thermoplastic, Internal Switch(s)="Single Switch, Normally Closed", Mounting Type="Through Hole, Right Angle", Number of Positions/Contacts="2 Conductors, 3 Contacts", Plug/Mating Plug Diameter="2.1mm ID, 5.5mm OD", Pricing 1="1=1.01, 10=0.704, 100=0.4724, 500=0.3819, 1000=0.3417, 2500=0.27135 (USD)", Published=17-Dec-2003, Publisher="Altium Limited", RoHS="RoHS Compliant", Shielding=Unshielded, Stock 1=47553, Supplier 1=Digi-Key, Termination="Solder Eyelet(s)"
L1: library part L/4.7uH/3A, "FIXED IND 4.7UH 3A 37.6 MOHM SMD", Current Rating (Amps)=3A, Current Saturation (Amps)=4A, DC Resistance (DCR)="37.6mOhm Max", Manufacturer Part Number=SRN6045-4R7Y, Datasheet=https://www.bourns.com/data/global/pdfs/SRN6045.pdf, Inductance=4.7uH, Shielding=Semi-Shielded, Size / Dimension="0.236\" L x 0.236\" W (6.00mm x 6.00mm)"
Q1: "MOSFET P-CH 60V 7A SOT223", Current - Continuous Drain (Id) @ 25°C="7A (Ta), 18.2A (Tc)", Drain to Source Voltage (Vdss)=60V, Drive Voltage (Max Rds On,  Min Rds On)="4.5V, 10V", Manufacturer="Diodes Incorporated", Operating Temperature="-55°C ~ 150°C (TJ)", Package / Case="TO-261-4, TO-261AA", Power Dissipation (Max)="2W (Ta)", Supplier Device Package=SOT-223, Supplier Part Number 1=DMP6023LE-13DICT-ND, Category="Discrete Semiconductor Products", ComponentLink1Description=https://www.diodes.com/assets/Datasheets/DMP6023LE.pdf, ComponentLink1URL=https://www.diodes.com/assets/Datasheets/DMP6023LE.pdf, FET Feature=-, FET Type=P-Channel, Manufacturer Part Number=DMP6023LE-13, Mounting Type="Surface Mount", Packaging="Cut Tape (CT)", Part Status=Active, Pricing 1="1=0.95, 10=0.829, 100=0.6396, 500=0.4738, 1000=0.37904 (USD)", Rds On (Max) @ Id, Vgs="28 mOhm @ 5A, 10V", RoHS="RoHS Compliant", Stock 1=16540, Supplier 1=Digi-Key, Technology="MOSFET (Metal Oxide)", Vgs (Max)=±20V, Vgs(th) (Max) @ Id="3V @ 250µA"
R1 R2 R6: library part "RES 10K OHM 1% 1/16W 0402", "10K 0402", Manufacturer="Samsung Electro-Mechanics", Manufacturer Part Number=RC1005F103CS, Operating Temperature="-55°C ~ 155°C", Package / Case="0402 (1005 Metric)", Power (Watts)="0.063W, 1/16W", Supplier Device Package=0402, Supplier Part Number 1=1276-3431-1-ND, Temperature Coefficient=±100ppm/°C, Tolerance=±1%, Category=Resistors, ComponentLink1Description=http://www.samsungsem.com/kr/support/product-search/chip-resistor/RC1005F103CS.jsp, ComponentLink1URL=http://www.samsungsem.com/kr/support/product-search/chip-resistor/RC1005F103CS.jsp, Composition="Thick Film", Failure Rate=-, Features="Moisture Resistant", Height - Seated (Max)="0.016\" (0.40mm)", Packaging="Cut Tape (CT)", Part Status=Active, Pricing 1="1=0.1, 10=0.021, 100=0.0086, 1000=0.00385, 2500=0.00334, 5000=0.00276 (USD)", RoHS="RoHS Compliant", Size / Dimension="0.039\" L x 0.020\" W (1.00mm x 0.50mm)", Stock 1=25834562, Supplier 1=Digi-Key
R3: library part "RES 1K OHM 1% 1/16W 0402", "1K 0402", Case/Package=0402, Case Code (Metric)=1005, Manufacturer=Yageo, Manufacturer Part Number=RC0402FR-071KL, Max Operating Temperature=155°C, Min Operating Temperature=-55°C, Power Rating=62.5mW, Supplier Part Number 1=311-1.00KLRCT-ND, Temperature Coefficient=100ppm/°C, Tolerance=1%, Voltage Rating=50V, Case Code (Imperial)=0402, Category=Resistors, ComponentLink1Description=https://datasheet.ciiva.com/2453/pyu-r-int-thick-7-2453361.pdf, ComponentLink1URL=https://datasheet.ciiva.com/2453/pyu-r-int-thick-7-2453361.pdf, ComponentLink2Description=https://datasheet.ciiva.com/2453/pyu-r-int-thick-7-2453362.pdf, ComponentLink2URL=https://datasheet.ciiva.com/2453/pyu-r-int-thick-7-2453362.pdf, ComponentLink3Description=https://datasheet.ciiva.com/2453/pyu-r-int-thick-7-2453363.pdf, ComponentLink3URL=https://datasheet.ciiva.com/2453/pyu-r-int-thick-7-2453363.pdf, ComponentLink4Description=https://datasheet.ciiva.com/22747/1018594-22747509.pdf, ComponentLink4URL=https://datasheet.ciiva.com/22747/1018594-22747509.pdf, ComponentLink5Description=https://datasheet.ciiva.com/15189/getdatasheetpartid-323696-15189334.pdf, ComponentLink5URL=https://datasheet.ciiva.com/15189/getdatasheetpartid-323696-15189334.pdf, ComponentLink6Description=https://datasheet.ciiva.com/16740/pyu-rc0402-51-rohs-l-6-r-16740567.pdf, ComponentLink6URL=https://datasheet.ciiva.com/16740/pyu-rc0402-51-rohs-l-6-r-16740567.pdf, ComponentLink7Description=https://datasheet.ciiva.com/12667/pyu-rc0402-51-rohs-l-6-r-12667930.pdf, ComponentLink7URL=https://datasheet.ciiva.com/12667/pyu-rc0402-51-rohs-l-6-r-12667930.pdf, ComponentLink8Description=https://datasheet.ciiva.com/11819/0900766b80c66297-11819452.pdf, ComponentLink8URL=https://datasheet.ciiva.com/11819/0900766b80c66297-11819452.pdf, ComponentLink9Description=https://datasheet.ciiva.com/11819/0900766b80c66297-11819477.pdf, ComponentLink9URL=https://datasheet.ciiva.com/11819/0900766b80c66297-11819477.pdf, ComponentLink10Description=https://datasheet.ciiva.com/12666/pyu-rc0402-51-rohs-l-6-r-12666741.pdf, ComponentLink10URL=https://datasheet.ciiva.com/12666/pyu-rc0402-51-rohs-l-6-r-12666741.pdf, ComponentLink11Description=https://datasheet.ciiva.com/17063/pyu-rc0402-51-rohs-l-6-r-17063193.pdf, ComponentLink11URL=https://datasheet.ciiva.com/17063/pyu-rc0402-51-rohs-l-6-r-17063193.pdf, ComponentLink12Description=https://datasheet.ciiva.com/22747/1018594-22747513.pdf, ComponentLink12URL=https://datasheet.ciiva.com/22747/1018594-22747513.pdf, ComponentLink13Description=https://datasheet.ciiva.com/7849/1018594-7849869.pdf, ComponentLink13URL=https://datasheet.ciiva.com/7849/1018594-7849869.pdf, ComponentLink14Description=https://datasheet.ciiva.com/7983/1018594-7983502.pdf, ComponentLink14URL=https://datasheet.ciiva.com/7983/1018594-7983502.pdf, ComponentLink15Description=https://datasheet.ciiva.com/7849/1018594-7849871.pdf, ComponentLink15URL=https://datasheet.ciiva.com/7849/1018594-7849871.pdf, Composition="Thick Film", Depth=0.5mm, Height=0.32mm, Lead Free="Lead Free", Length=1mm, Military Standard=Not, Number of Pins=2, Package / Case=0402, Packaging="Tape and Reel", Pricing 1="1=0.1, 10=0.014, 100=0.0056, 1000=0.0025, 2500=0.0022, 5000=0.0018 (USD)", REACH SVHC=Unknown, Resistance=1K, Stock 1=21888659, Supplier 1=Digi-Key, Termination=SMD/SMT, Voltage Rating (DC)=50V, Width=0.5mm
R4: library part "RES 56.2K OHM 1% 1/10W 0402", "56.2K 1% 0402", Manufacturer="Panasonic Electronic Components", Manufacturer Part Number=ERJ-2RKF5622X, Operating Temperature="-55°C ~ 155°C", Package / Case=0402, Power (Watts)="0.1W, 1/10W", Resistance (Ohms)=56.2k, Supplier Part Number 1=P56.2KLCT-ND, Temperature Coefficient=±100ppm/°C, Tolerance=±1%, Category=Resistors, ComponentLink1Description=http://industrial.panasonic.com/www-cgi/jvcr13pz.cgi?E+PZ+3+AOA0002+ERJ2RKF5622X+7+WW, ComponentLink1URL=http://industrial.panasonic.com/www-cgi/jvcr13pz.cgi?E+PZ+3+AOA0002+ERJ2RKF5622X+7+WW, Composition="Thick Film", Failure Rate=-, Features="Automotive AEC-Q200", Height="0.016\" (0.40mm)", Number of Terminations=2, Packaging="Cut Tape (CT)", Part Status=Active, Pricing 1="1=0.1, 50=0.0124, 100=0.0091, 250=0.00692, 500=0.00554, 1000=0.00408, 5000=0.00293 (USD)", RoHS="RoHS Compliant", Size / Dimension="0.039\" L x 0.020\" W (1.00mm x 0.50mm)", Stock 1=222789, Supplier 1=Digi-Key, Supplier Device Package=0402
R5: library part "RES 470 OHM 1% 1/10W 0402", "470 0402", Manufacturer="Panasonic Electronic Components", Manufacturer Part Number=ERJ-2RKF4700X, Operating Temperature="-55°C ~ 155°C", Package / Case=0402, Power (Watts)="0.1W, 1/10W", Supplier Part Number 1=P470LCT-ND, Temperature Coefficient=±100ppm/°C, Tolerance=±1%, Category=Resistors, ComponentLink1Description=https://industrial.panasonic.com/cdbs/www-data/pdf/RDA0000/AOA0000C283.pdf, ComponentLink1URL=https://industrial.panasonic.com/cdbs/www-data/pdf/RDA0000/AOA0000C283.pdf, Composition="Thick Film", Failure Rate=-, Features="Automotive AEC-Q200", Height - Seated (Max)="0.016\" (0.40mm)", Number of Terminations=2, Packaging="Cut Tape (CT)", Part Status=Active, Pricing 1="1=0.1, 10=0.025, 25=0.018, 50=0.0136, 100=0.01, 250=0.00764, 500=0.00612, 1000=0.00451, 5000=0.00323 (USD)", Resistance (Ohms)=470, RoHS="RoHS Compliant", Size / Dimension="0.039\" L x 0.020\" W (1.00mm x 0.50mm)", Stock 1=342632, Supplier 1=Digi-Key, Supplier Device Package=0402
R7: library part "RES 100 OHM 1% 1/16W 0402", "100 0402", Manufacturer=Yageo, Manufacturer Part Number=RC0402FR-07100RL, Operating Temperature="-55°C ~ 155°C", Package / Case="0402 (1005 Metric)", Power (Watts)="0.063W, 1/16W", Supplier Device Package=0402, Supplier Part Number 1=311-100LRCT-ND, Temperature Coefficient=±100ppm/°C, Tolerance=±1%, Category=Resistors, ComponentLink1Description=http://www.yageo.com/documents/recent/PYu-RC_Group_51_RoHS_L_8.pdf, ComponentLink1URL=http://www.yageo.com/documents/recent/PYu-RC_Group_51_RoHS_L_8.pdf, Composition="Thick Film", Failure Rate=-, Features="Moisture Resistant", Height - Seated (Max)="0.016\" (0.40mm)", Packaging="Cut Tape (CT)", Part Status=Active, Pricing 1="1=0.1, 10=0.014, 100=0.0056, 1000=0.00253, 2500=0.0022, 5000=0.00181 (USD)", RoHS="RoHS Compliant", Size / Dimension="0.039\" L x 0.020\" W (1.00mm x 0.50mm)", Stock 1=14557677, Supplier 1=Digi-Key
R8: library part "RES 4.7K OHM 1/10W 5% 0603 SMD", "4.7K 0603", Manufacturer="Panasonic Electronic Components", Manufacturer Part Number=ERJ-3GEYJ472V, Package / Case=0603, Power (Watts)="0.1W, 1/10W", Resistance (Ohms)=4.7k, Supplier Part Number 1=P4.7KGCT-ND, Temperature Coefficient=±200ppm/°C, Tolerance=±5%, Category=Resistors, ComponentLink1Description=http://industrial.panasonic.com/www-cgi/jvcr13pz.cgi?E+PZ+3+AOA0001+ERJ3GEYJ472V+7+WW, ComponentLink1URL=http://industrial.panasonic.com/www-cgi/jvcr13pz.cgi?E+PZ+3+AOA0001+ERJ3GEYJ472V+7+WW, Composition="Thick Film", Features="Automotive AEC-Q200 Qualified", Height="0.022\" (0.55mm)", Number of Terminations=2, Packaging="Cut Tape (CT)", Pricing 1="1=0.1, 50=0.0126, 100=0.0096, 250=0.00716, 500=0.00528, 1000=0.00352, 2500=0.00297 (USD)", RoHS="RoHS Compliant", Size / Dimension="0.063\" L x 0.031\" W (1.60mm x 0.80mm)", Stock 1=1261582, Supplier 1=Digi-Key, Supplier Device Package=0603
SW1: library part "PTS645SM43SMTR92 LFS", "SWITCH TACTILE SPST-NO 0.05A 12V", Contact Rating @ Voltage="0.05A @ 12VDC", Illumination Type, Color=-, Manufacturer=C&K, Operating Force=160gf, Operating Temperature="-20°C ~ 60°C", Supplier Part Number 1=CKN9112CT-ND, Actuator Height off PCB, Vertical=4.30mm, Actuator Length, Right Angle=-, Actuator Material="Polyamide (PA66), Nylon 6/6", Actuator Orientation="Top Actuated", Actuator Type=Standard, Category=Switches, Circuit=SPST-NO, ComponentLink1Description=http://www.ckswitches.com/media/1471/pts645.pdf, ComponentLink1URL=http://www.ckswitches.com/media/1471/pts645.pdf, Features="Blue Actuator", Illumination=Non-Illuminated, Illumination Voltage (Nominal)=-, Ingress Protection=-, Manufacturer Part Number="PTS645SM43SMTR92 LFS", Mechanical Life="100,000 Cycles", Mounting Type="Surface Mount", Outline="6.00mm x 6.00mm", Packaging="Cut Tape (CT)", Part Status=Active, Pricing 1="1=0.15, 10=0.147, 25=0.1416, 50=0.1366, 100=0.129, 250=0.12144, 500=0.11638 (USD)", RoHS="RoHS Compliant", Stock 1=234699, Supplier 1=Digi-Key, Switch Function=Off-Mom, Switch Travel=-, Termination Style="Gull Wing"
TP1 TP2 TP3 TP4 TP5 TP6: library part CMP-001-0557-03, "Test Point- Current one", Component Name=TestPoint, Pin Count=1
U1: "IC REG BUCK ADJ 2A TSOT23-6", Current - Output=2A, Frequency - Switching=650KHZ, Manufacturer Part Number=TPS562209DDCR, Supplier Device Package=TSOT-23-6, Voltage - Input (Max)=17V, Voltage - Input (Min)=4.5V, Voltage - Output (Max)=7V, Voltage - Output (Min/Fixed)=0.765V, Topology=Buck
U2: library part LD1117S33, "3.3 volt fixed regulator, 800mA", Supplier Part Number 1=497-1242-1-ND, Supplier 1=Digi-Key
U3 U4 U5 U6 U7 U8 U9 U10 U11 U12: library part U/SK6812MINI, "Serial RGB LED SMT5050"

## Free pads (board coordinates)
  round 236.22 hole 157.48: 0(772.05,762.05) 0(772.05,2140) 0(2145,2140) 0(2150,762.05)

## Via types
v1: diameter 16, hole 8, Top Copper to Bottom Copper, 282 vias
v2: diameter 20, hole 12, Top Copper to Bottom Copper, 10 vias
v3: diameter 16, hole 16, Top Copper to Bottom Copper, 1 vias

## Nets (pads, with @x,y where several pads share a name; then routed paths per layer and width w, separated by ;. In a path a pad name is that pad's centre, name@x,y a point inside that pad or via, vN(x,y) a via of type N, cw(c..) or ccw(c..) an arc to the next point about the centre after c; other vN are vias at no path point)
3.3V: C1.1 C2.1 C12.1 C13.1 C14.1 C26.1 CN1.8 CN2.2 CN3.2 CN5.1 R1.2 R2.2 R7.2 R8.2 TP4.1 U2.2 U2.4 | length 712.8
  Top Copper w20: CN5.1 420.28,730.53 C1.1 ; CN3.2 486.3,2207.68 C26.1 ; v1(1711.61,1043.31) 1711.61,1022.55 1712.64,1021.53 R7.2 ; R2.2 2384.84,1990.16 v2(2387.8,1993.11) ; R1.2 v2(2358.27,2366.14) ; R8.2 v3(2542.32,1230.32) ; C2.1 2604.25,1019.78 CN2.2
  Bottom Copper w20: TP4.1 v2(1248.02,1447.7)
  other v1: 471,1853 505.14,1853 537,1853 573,1853 606,1853
5V: C6.1 C7.1 C8.1 C16.1 C17.1 C18.1 C19.1 C20.1 C21.1 C22.1 C23.1 C24.1 C25.1 FB1.1 L1.1 R4.2 R5.2 TP3.1 U3.4 U4.4 U5.4 U6.4 U7.4 U8.4 U9.4 U10.4 U11.4 U12.4 | length 2404.8
  Top Copper w10: R4.2 945,508.5 1055.56,397.94 C6.1
  Top Copper w30: U3.4 611,496 636,521 636,529 C16.1 666,561 v1(698,593) ; U4.4 780,400 C17.1 825,455 v1(853,483) ; U5.4 994,295.43 C18.1 994,368 v1(1014,388) ; U6.4 1190.42,217 C19.1 1200,302.43 v1(1200,338) ; v1(1381,310) 1381,263.88 C20.1 1377.38,178.26 U7.4 ; v1(1610,313) 1610,278.37 C21.1 1600.38,199.81 U8.4 ; v2(1688.98,917.32) 1691.66,914.64 R5.2 ; v1(1805,347.36) 1805,316.73 C22.1 1825.38,269.19 U9.4 ; C23.1 1983.31,372.31 v1(2003,392) 2003,319.44 U10.4 ; C24.1@2139.07,466.07 C24.1 2194.39,406.47 U11.4 ; C25.1 2306.41,586.27 v1(2328.74,563.94) U12.4
  Top Copper w60: C6.1 C7.1 C8.1 1627.54,397.94 L1.1
  Bottom Copper w30: v1(1381,310) 1415.86,310 1468,257.86 TP3.1
  other v1: 2164.6,436.27 1977,451 2020,468 2020,494.81 2020,522 2019,549 2019,575 1973,596 685.04,1156.5 738.19,1158.46 634.84,1162.4 631.89,1207.68 735.24,1207.68
12V: C3.1 C4.1 C5.1 CN6.1 J2.1 Q1.S U1.3 U1.5 | length 1689.4
  Top Copper w10: U1.5 1049,658 1099.72,708.72 1151.28,708.72 1151.82,708.18 ; 1096.45,715.21 1151.82,715.21 1151.82,708.18 ; 1153,707 1151.82,708.18
  Top Copper w50: 1478.35,2202.76 1670.28,2202.76 2155.51,1717.52 Q1.S
  Top Copper w100: CN6.1 986.22,2683.78 J2.1
  other v1: 1387.8,1023.62 1433.73,1023.62 1479.66,1023.62 1525.59,1023.62 1387.8,1052.17 1433.73,1052.17 1479.66,1052.17 1525.59,1052.17 1382.87,2188.98 1428.81,2188.98 1474.74,2188.98 1382.87,2217.52 1428.81,2217.52 1474.74,2217.52
BTN_SEL: C15.1 CN1.5 R1.1 SW1.1 SW1.2 | length 2973.1
  Top Copper w20: R1.1 2409.01,2295.94 SW1.2 v2(2453.81,2225.46) SW1.1 2666.46,2012.82 C15.1
  Bottom Copper w10: CN1.5 814.96,1612.2 814.96,1933.07 1424.21,1933.07 1785.43,2294.29 2384.99,2294.29 v2(2453.81,2225.46)
Data: U7.1 U8.3 | length 455.1
  Top Copper w10: U7.1 1273.1,180.64 1306.77,146.97 1306.77,145.94 1326.77,125.94 1326.77,81.69 1352.36,56.1 1574.1,56.1 U8.3
DHT22: CN1.11 CN2.1 R8.1 | length 900.4
  Top Copper w10: CN1.11 2080.32,1319.29 2268.83,1130.77 CN2.1 ; R8.1@2518.7,1143.7 R8.1
ECHO: CN1.7 CN5.3 | length 768.2
  Top Copper w10: CN5.3 428.16,922.52 509.58,1003.94 792.52,1003.94 CN1.7
  Top Copper w20: CN1.7@1007.87,1204.72 CN1.7
GND: C1.2 C2.2 C3.2 C4.2 C5.2 C6.2 C7.2 C8.2 C10.2 C11.2 C12.2 C13.2 C14.2 C15.2 C16.2 C17.2 C18.2 C19.2 C20.2 C21.2 C22.2 C23.2 C24.2 C25.2 C26.2 CN1.10 CN2.3 CN3.3 CN4.2 CN5.4 CN6.2 D1.1 D2.1 D3.1 J2.2 J2.3 R6.1 SW1.3 SW1.4 TP5.1 TP6.1 U1.1 U2.1 U3.2 U4.2 U5.2 U6.2 U7.2 U8.2 U9.2 U10.2 U11.2 U12.2 | length 1451.4
  Top Copper w10: v1(451,552) v1@451.56,552 ; R6.1 945,707 v1(960,722)
  Top Copper w20: C16.2 C16.2@621.46,608.58
  Top Copper w30: v1@451.56,552 U3.2 ; C1.2 480.18,740.18 v1(485,745) ; CN3.3 488.07,2294.33 C26.2 ; v1(608,395) 632.08,370.92 U4.2 ; C16.2@621.46,608.58 v1(646,633.13) ; C17.2 773.4,498.4 v1(792,517) ; v1(793,275) 815.59,252.41 U5.2 ; C18.2 936.91,398.91 v1(952,414) ; v1(1004,177) 1018.55,162.45 U6.2 ; C19.2 1129.58,340.58 v1(1137,348) ; v1(1221,115) 1224,112 U7.2 ; C20.2 1317,268.12 v1(1317,306) ; v1(1468,97) 1513,97 U8.2 ; v1(1531,301) 1531,269.88 C21.2 ; v1(1690,113) 1722.38,113 U9.2 ; v1(1720,324) 1720,297.43 C22.2 ; v1(1893,382) 1893,367.14 C23.2 ; 1898.9,960.19 D3.1 ; D2.1 1901.77,947.12 v1(1905.51,950.86) ; v1(1910,169) 1931,169 U10.2 ; v1(2052.69,410) 2063.27,410 C24.2 ; v1(2105,256) 2115,256 U11.2 ; v1(2217,516) 2219,516 C25.2 ; v2(2225.39,1553.15) 2227.36,1553.15 2246.26,1572.05 D1.1 ; v1(2290,377) 2293,377 U12.2 ; v2(2552.17,2481.3) 2555.28,2481.3 SW1.4 ; C2.2 2560.09,969.91 v1(2585,945) ; SW1.3 2764.72,2134.88 v2(2796.26,2103.35) ; C15.2 2815.92,2044.32 v2(2818.9,2041.34)
  other v1: 1285,-55 1485,-55 1685,-55 1446.77,-53.24 1610,-45.79 1269,-41.1 1762.97,-22.4 1110.24,-11.81 1919.29,17.72 953.39,34.79 2057,70.55 805.36,97 2182.09,131.89 785,145 985,145 685.04,162.26 2288.14,195.87 580.04,231.73 2385.46,266 485.63,306 485,345 685,345 885,345 1085,345 1285,345 1485,345 1685,345 2493.24,359 394.88,390.18 2600,471.38 315.83,476.27 2459.27,537.06 385,545 785,545 1985,545 2185,545 2585,545 249.31,560.57 1179,563 1223.78,563 1269,563 1367,563 1412,563 1461,563 1554,563 1322,564 1509,564 2135.96,575 2687.64,584.18 2531.5,619.09 386.81,633.9 2754.92,687.01 2600,715.36 146.2,722 319.77,722 285,745 1085,745 1685,745 1885,745 2485,745 2685,745 2340.55,783.46 1914.45,876.55 2437.14,935.54 185,945 585,945 785,945 985,945 1785,945 1985,945 2185,945 2385,945 34.45,978.23 190.93,983.8 1910,1035.31 2493.24,1061.89 160.43,1109.8 -4.92,1136.81 85,1145 285,1145 485,1145 885,1145 1085,1145 1285,1145 1485,1145 1685,1145 2085,1145 2788.61,1219.29 128.87,1266.1 2551.59,1294.61 -29.53,1307.09 2958.66,1336.61 185,1345 785,1345 1385,1345 1585,1345 1785,1345 1985,1345 2185,1345 2385,1345 2585,1345 2785,1345 386.81,1378.94 2808.07,1405.51 2561.35,1412.16 110.39,1423 749,1455 689,1458 2962.6,1470.47 -40.35,1481.3 705.92,1512 117.92,1535.41 752,1541 2557.34,1543.31 85,1545 1085,1545 1285,1545 1485,1545 1685,1545 2285,1545 2485,1545 2685,1545 2885,1545 2808.07,1547.81 2951.74,1612.16 -29.53,1622 752,1622 128.87,1658.82 2536.48,1678.94 2788.61,1678.94 754,1688 185,1745 785,1745 1185,1745 1385,1745 1585,1745 1785,1745 1985,1745 2385,1745 2585,1745 2785,1745 -5.91,1766.73 160.43,1799.21 34.45,1914.37 201.77,1929.13 474.47,1929.13 85,1945 285,1945 1485,1945 2085,1945 2485,1945 2685,1945 522.64,2008.86 89.57,2059.06 2342.46,2103.35 585,2145 985,2145 1185,2145 1385,2145 1585,2145 1985,2145 2385,2145 2585,2145 796.26,2325.79 685,2345 885,2345 2085,2345 2285,2345 2685,2345 2041.33,2379.17 896.65,2388.78 1001.4,2443.22 1907.87,2449.71 2328.11,2481.3 606,2493.08 1141.73,2499.02 1773.87,2499.02 1274.96,2528.22 1613.19,2536.42 2480.32,2542.32 585,2545 785,2545 1185,2545 1585,2545 1785,2545 1985,2545 2185,2545 2385,2545 459.65,2568.9 2193.9,2577.76 734.25,2581.69 2086.66,2642.38 2368.11,2642.38 579.72,2665.35 1953.74,2699.8 2237.2,2730.31 700.23,2741.78 1685,2745 1885,2745 2085,2745 1811.02,2750 1654.53,2780.51 2075.79,2814.96 1935.04,2869.09 1780.51,2914.37 1169.91,2920 1605.32,2937.01 1334.65,2939.96
NeoPixel: CN1.4 U3.3 | length 1649.1
  Top Copper w10: U3.3 562.28,527.56 577.28,542.56 577.28,849.92 643.7,916.34 1000.98,916.34 1043.31,958.66 1162,1077.35 1162,1449.8 1092.52,1519.29 CN1.4
NetC9_1: C9.1 U1.6 | length 93.7
  Top Copper w10: C9.1 1005.44,610.31 U1.6@1017.73,622.6
NetC9_2: C9.2 L1.2 U1.2 | length 869.3
  Top Copper w10: C9.2 1060.56,633.13 1085,657.57 1085,658 1087,660 U1.2@1126,660
  Top Copper w20: U1.2@1126,660 1154,660 1162,668 1201,668
  Top Copper w50: 1201,668 L1.2@1816,668
NetC10_1: C10.1 C11.1 FB1.2 U2.3
NetCN4_1: CN4.1 Q1.D R3.2 | length 742.2
  Top Copper w20: R3.2 2427.44,1770.95 Q1.D@2464.57,1808.07
  Top Copper w30: Q1.D@2220.47,1808.07 2464.57,1808.07 2742.42,1808.07 CN4.1
NetD1_2: D1.2 R3.1 | length 78.8
  Top Copper w20: D1.2 R3.1
NetD2_2: D2.2 R5.1 | length 89.2
  Top Copper w15: R5.1 1847.4,914.64 D2.2
NetD3_2: D3.2 R7.1 | length 94.3
  Top Copper w20: R7.1 1844.41,991.05 D3.2
NetR4_1: R4.1 R6.2 U1.4 | length 129.6
  Top Copper w10: R4.1 R6.2 956.31,661.31 990.4,695.4 U1.4
NetU3_1: U3.1 U4.3 | length 448.1
  Top Copper w10: U3.1 531.66,489.66 505,463 505,411 609.44,306.56 U4.3
NetU4_1: U4.1 U5.3 | length 390.1
  Top Copper w10: U4.1 700,427.36 v1(725.39,452.76) ; v1(913.39,276.57) 913.39,228.48 U5.3
  Bottom Copper w10: v1(725.39,452.76) 737.2,452.76 v1(913.39,276.57)
NetU5_1: U5.1 U6.3 | length 480.8
  Top Copper w10: U5.1 877.95,301.2 880.87,301.2 880.87,234.3 877.95,231.38 877.95,179.13 970.47,86.61 1108.75,86.61 U6.3
NetU6_1: U6.1 U7.3 | length 389.5
  Top Copper w10: U6.1 1087.97,251.97 v1(1122.05,251.97) ; v1(1326.77,161.42) 1326.77,154.23 U7.3
  Bottom Copper w10: v1(1122.05,251.97) 1123.03,250.98 1237.2,250.98 v1(1326.77,161.42)
NetU8_1: U8.1 U9.3 | length 378.8
  Top Copper w10: U8.1 1510,171.41 v1(1553.15,214.57) ; v1(1777.56,195.87) 1818.93,154.49 U9.3
  Bottom Copper w10: v1(1553.15,214.57) 1571.85,195.87 v1(1777.56,195.87)
NetU9_1: U9.1 U10.3 | length 436.1
  Top Copper w10: U9.1 1734.98,192 1813.98,113 1957.54,113 2052.69,208.16 U10.3
NetU10_1: U10.1 U11.3 | length 442.7
  Top Copper w10: v1(1891.58,297.24) 1891.58,281.75 U10.1 ; v1(2148.73,373.05) 2174.42,347.36 U11.3
  Bottom Copper w10: v1(1891.58,297.24) 2027.51,297.24 2103.31,373.05 v1(2148.73,373.05)
NetU11_1: U11.1 U12.3 | length 432.6
  Top Copper w10: U11.1 2146.78,339.44 2186.02,300.2 2278.54,300.2 2404.34,425.99 U12.3
OLED_SCL: CN1.14 TP1.1 | length 302.1
  Bottom Copper w20: CN1.14 2130.19,1619.29 2183.07,1672.17 TP1.1
OLED_SDA: CN1.13 TP2.1 | length 320.1
  Bottom Copper w20: CN1.13 2096.93,1519.29 2186.02,1430.2 TP2.1
PUMP_CTRL: CN1.3 Q1.G R2.1 | length 1529.7
  Top Copper w20: v2(2128.94,1948.82) 2170.28,1948.82 Q1.G 2221.46,1898.62 R2.1
  Bottom Copper w10: CN1.3 1380.11,1619.29 1745.08,1984.25 2093.5,1984.25 v2(2128.94,1948.82)
SOIL_SEN: CN1.2 CN3.1 | length 834.5
  Top Copper w25: CN3.1 515.32,2114.61 917.32,1712.6 1001.19,1712.6 CN1.2
TRIG: CN1.6 CN5.2 | length 933
  Top Copper w10: CN5.2 279.33,1033.27 317.91,1071.85 760.44,1071.85 CN1.6
pads on no net: CN1.1 CN1.9 CN1.12 CN1.15 CN1.16 CN2.0 CN3.0 CN4.0 CN5.0 CN6.0 U12.1

## Polygon pours and split planes (outlines as drawn)
GND on Top Copper "GND_L01_P044" (solid, remove dead copper, pour order 44): 3032.48,1171.26 3032.48,766.06 2117.68,-143.54 757.48,-143.54 -101.74,715.67 -121.62,1640.41 -121.62,2104.81 789.83,3006.06 1872.68,3006.06 2112.97,3006.06 3032.48,2086.55
12V on Top Copper "12V_L01_P008" (solid, pour order 8): 1162.63,700 1144.63,682 1087,682 1087,715 1126,754 1127,754 1127,922 1275,1070 1605,1070 1605,700
3.3V on Top Copper "3.3V_L01_P006" (solid, pour order 6): 232.28,1761 346.28,1875 645,1875 667,1853 667,1535.41 623.59,1492 346,1492 346,1247.57 407.48,1247.57 407.48,1254.92 429.13,1276.57 429.13,1375.98 502.95,1375.98 513.78,1365.16 513.78,1158.46 280.51,1158.46 232.28,1206.69
12V on Top Copper "12V_L01_P034" (solid, pour order 34): 1362.23,2153.54 1553.02,2153.54 1554,2154.53 1541.34,2167.19 1541.34,2747.05 1351.68,2747.05
5V on Top Copper "5V_L01_P026" (solid, pour order 26): 1954,437 1949.33,432.33 1756.97,432.33 1756.97,545.34 1758.38,546.75 1876.75,546.75 1956.49,626.49 2047,626.49 2047,455.35 2028.65,437
5V on Top Copper "5V_L01_P030" (solid, pour order 30): 611.22,1136.81 611.22,1232.28 622.05,1243.11 761.06,1243.11 761.06,1136.81
NetC10_1 on Top Copper "NETC10_1_L01_P000" (solid, pour order 0): 515.08,1373.33 519,1369.4 519,1246 753,1246 777,1270 777,1375.47 749.47,1403 605,1403
3.3V on Power "3.3V_L03_P032" (solid, pour order 32): 3029.8,1194.19 3029.8,788.99 2115,-120.62 754.8,-120.62 -104.41,738.6 -124.3,1663.34 -124.3,2127.73 787.15,3028.99 1870,3028.99 2110.29,3028.99 3029.8,2109.48
5V on Power "5V_L03_P020" (solid, pour order 20): 621,1010 620.98,1010.02 620.98,1253.42 753.47,1253.42 761.81,1245.08 761.81,1010 1727,1010 2301,1010 2758,553 2771,553 2771,519 2513,261 2511,261 2119,-131 798,-131 341,326 168.65,557.64
12V on Power "12V_L03_P018" (solid, pour order 18): 1351.38,2241.14 1552.17,2241.14 1552.17,985.24 1368.04,985.24
5V on Power "5V_L03_P022" (solid, pour order 22): 484,-295
GND on GND "GND_L02_P002" (solid, pour order 2): 3040,1180 3040,774.8 2125.2,-134.8 765,-134.8 -94.22,724.41 -114.1,1649.15 -114.1,2113.55 797.35,3014.8 1880.2,3014.8 2120.49,3014.8 3040,2095.29
GND on Bottom Copper "GND_L04_P004" (solid, pour order 4): 3034.8,1187.19 3034.8,781.99 2120,-127.62 759.8,-127.62 -99.41,731.6 -119.3,1656.34 -119.3,2120.73 792.15,3021.99 1875,3021.99 2115.29,3021.99 3034.8,2102.48

## Silkscreen, mask and mechanical layers (free items; w line width, h text height)
Top Overlay:
  text "ESP-Grow Rev A / Kyle R. Designs" at 1035,2261 h60
  text "PUMP" at 2246.82,1500.98 h30
  text "3.3V" at 1973.43,969.49 h50
  text "5V" at 1983.27,879.92 h50
Mechanical 1:
  drawing of 296 lines, arcs and shapes, not listed
  text "Layer" at -532.5,4767.5 h60
  text "Name" at -122.59,4767.5 h60
  text "Material" at 807.16,4767.5 h60
  text "Thickness" at 1666.92,4767.5 h60
  text "Constant" at 2316.76,4767.5 h60
  text "Board Layer Stack" at 2886.62,4767.5 h60
  text "1" at -532.5,4647.5 h60
  text "Top Overlay" at -122.59,4647.5 h60
  text "2" at -532.5,4527.5 h60
  text "Top Mask" at -122.59,4527.5 h60
  text "Solder Resist" at 807.16,4527.5 h60
  text "0.59mil" at 1666.92,4527.5 h60
  text "3.8" at 2316.76,4527.5 h60
  text "3" at -532.5,4407.5 h60
  text "Top Copper" at -122.59,4407.5 h60
  text "Copper" at 807.16,4407.5 h60
  text "1.38mil" at 1666.92,4407.5 h60
  text "4" at -532.5,4287.5 h60
  text "Dielectric 1" at -122.59,4287.5 h60
  text "2313" at 807.16,4287.5 h60
  text "3.94mil" at 1666.92,4287.5 h60
  text "4.05" at 2316.76,4287.5 h60
  text "5" at -532.5,4167.5 h60
  text "GND" at -122.59,4167.5 h60
  text "Copper" at 807.16,4167.5 h60
  text "0.69mil" at 1666.92,4167.5 h60
  text "6" at -532.5,4047.5 h60
  text "Core" at -122.59,4047.5 h60
  text "FR-4" at 807.16,4047.5 h60
  text "49.80mil" at 1666.92,4047.5 h60
  text "4.5" at 2316.76,4047.5 h60
  text "7" at -532.5,3927.5 h60
  text "Power" at -122.59,3927.5 h60
  text "Copper" at 807.16,3927.5 h60
  text "0.69mil" at 1666.92,3927.5 h60
  text "8" at -532.5,3807.5 h60
  text "Dielectric 2" at -122.59,3807.5 h60
  text "2313" at 807.16,3807.5 h60
  text "3.94mil" at 1666.92,3807.5 h60
  text "4.05" at 2316.76,3807.5 h60
  text "9" at -532.5,3687.5 h60
  text "Bottom Copper" at -122.59,3687.5 h60
  text "Copper" at 807.16,3687.5 h60
  text "1.38mil" at 1666.92,3687.5 h60
  text "10" at -532.5,3567.5 h60
  text "Bottom Mask" at -122.59,3567.5 h60
  text "Solder Resist" at 807.16,3567.5 h60
  text "0.59mil" at 1666.92,3567.5 h60
  text "3.8" at 2316.76,3567.5 h60
  text "11" at -532.5,3447.5 h60
  text "Bottom Overlay" at -122.59,3447.5 h60
Drill Drawing:
  circle w10: c-499.38,6120.83 r20
  circle w10: c-499.38,6120.83 r33.33
  circle w10: c-499.38,5820.83 r33.33